# Altium PCB Medusa-AI-coral-dev.PcbDoc (part 1 of 2)
Units mil, origin at the board's own origin, x right, y up, seen from the top; angles counter-clockwise.
Board outline 7750 x 7750 mil, 4 copper layers (Top Layer, Layer 1, Layer 2, Bottom Layer), stack 23.756 mil thick; 116 components, 91 nets, 573 pads, 231 vias.
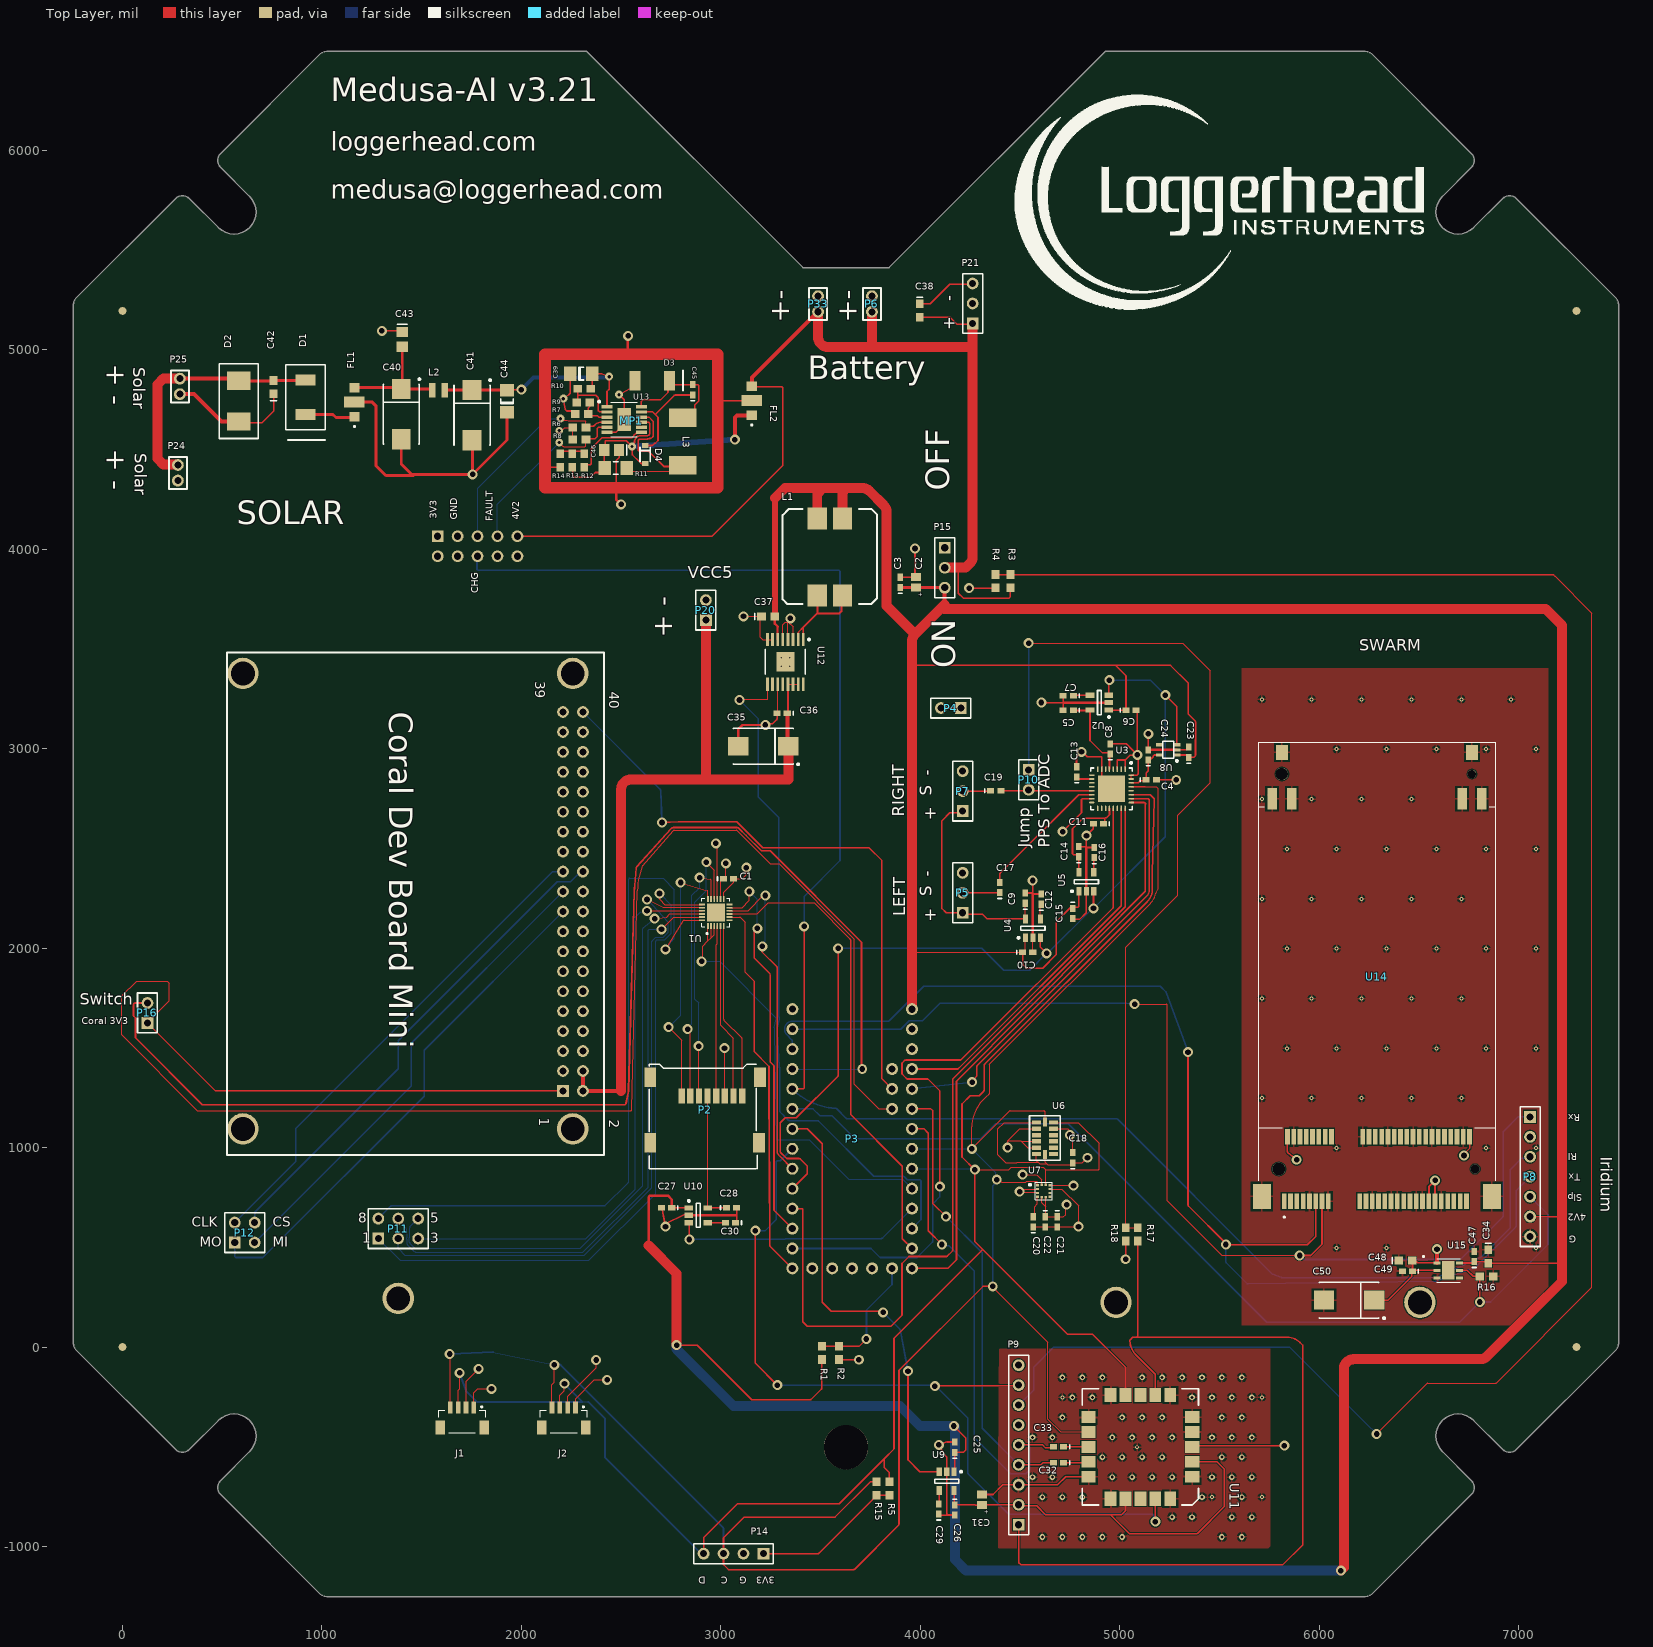
[diagram p0: Top Layer view]
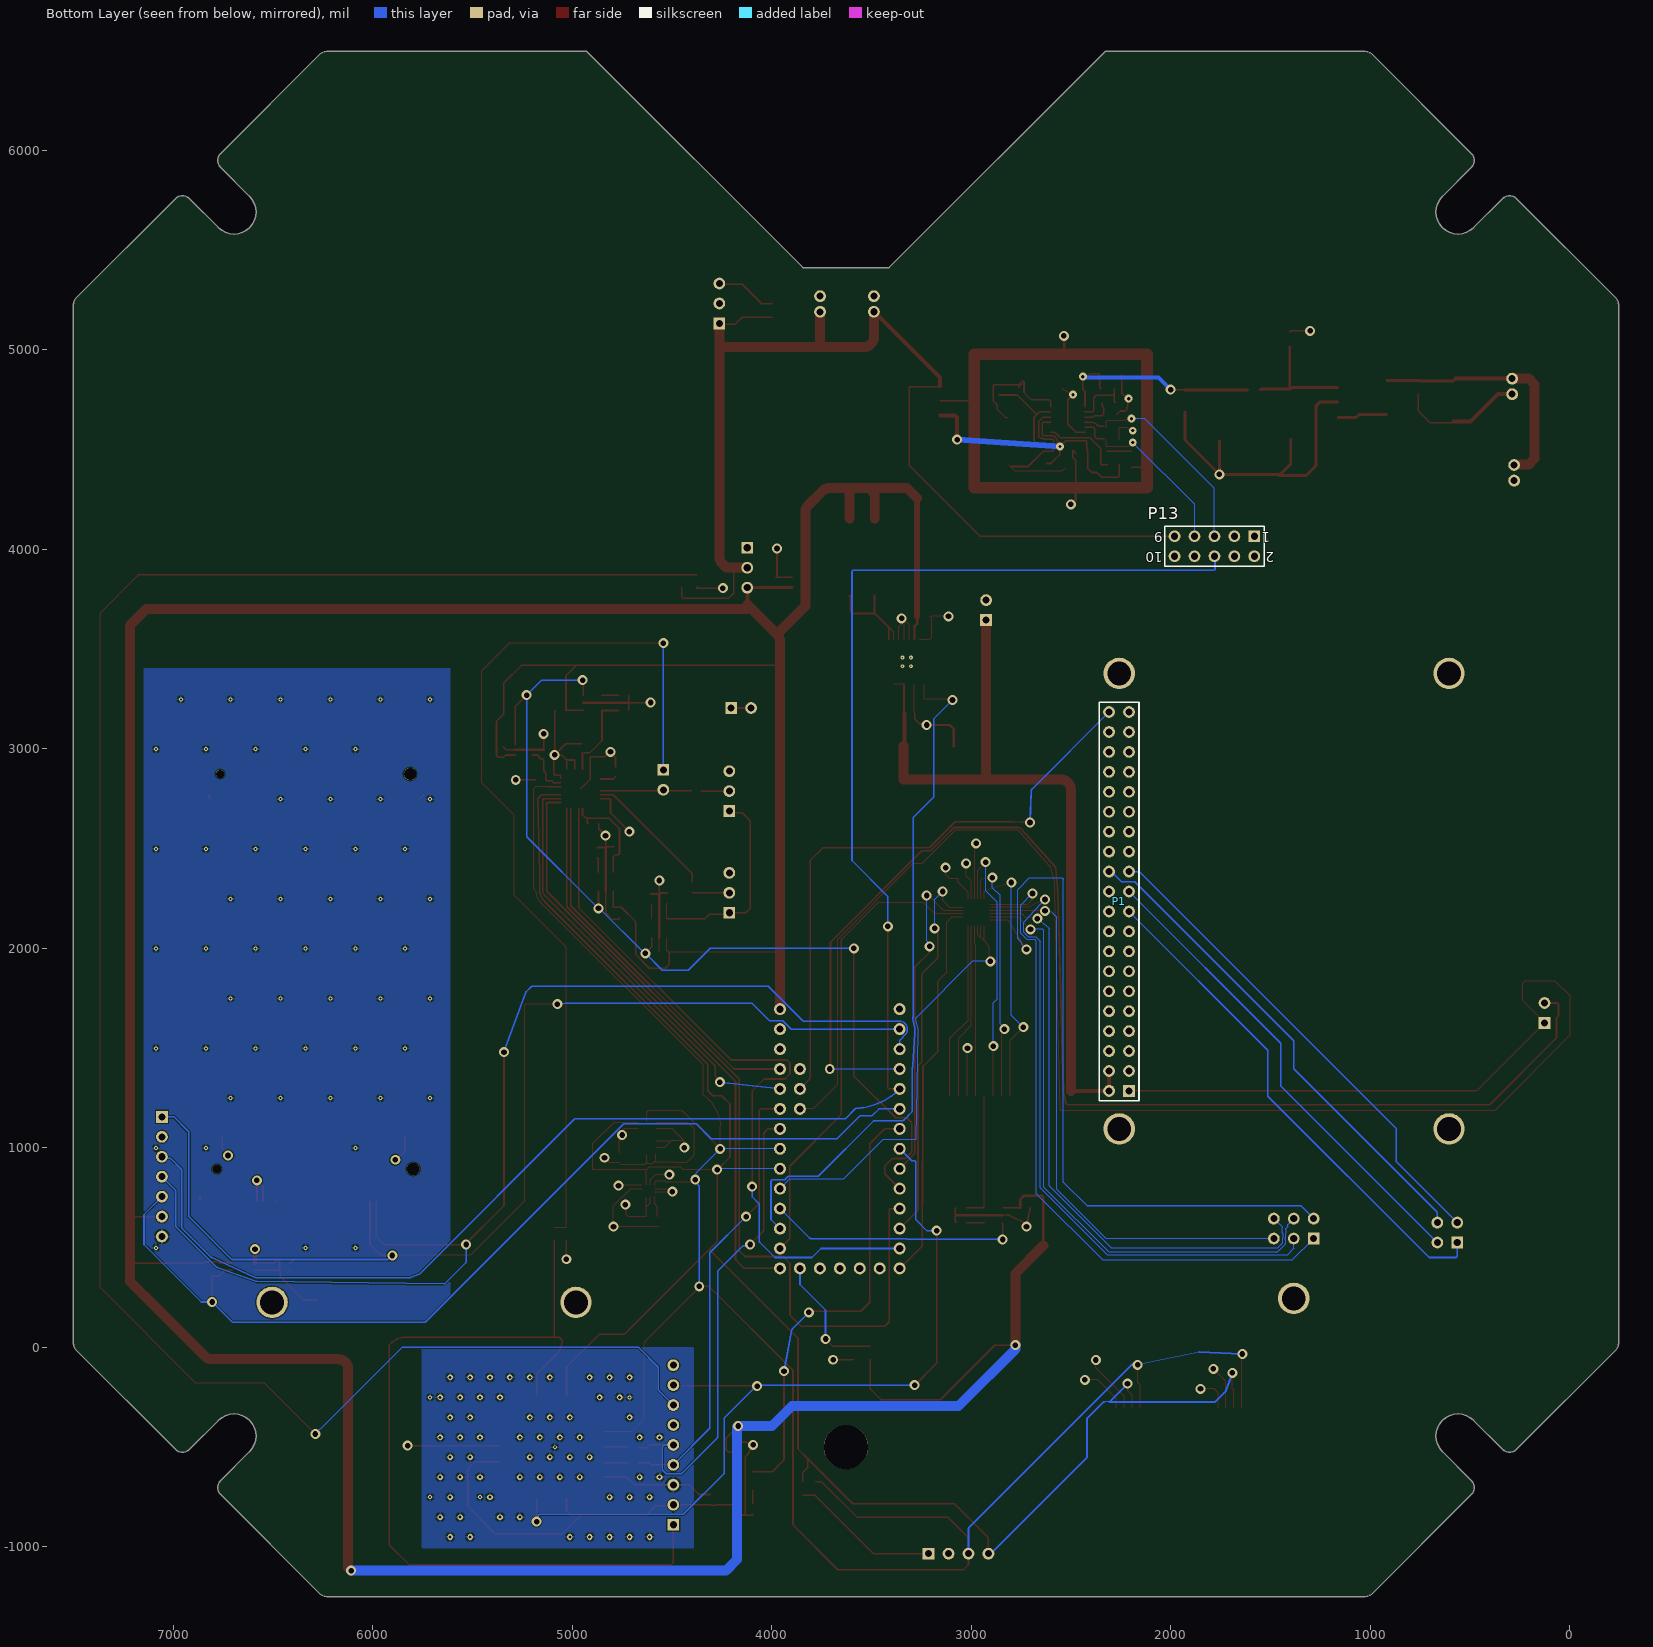
[diagram p1: Bottom Layer view, seen from below]
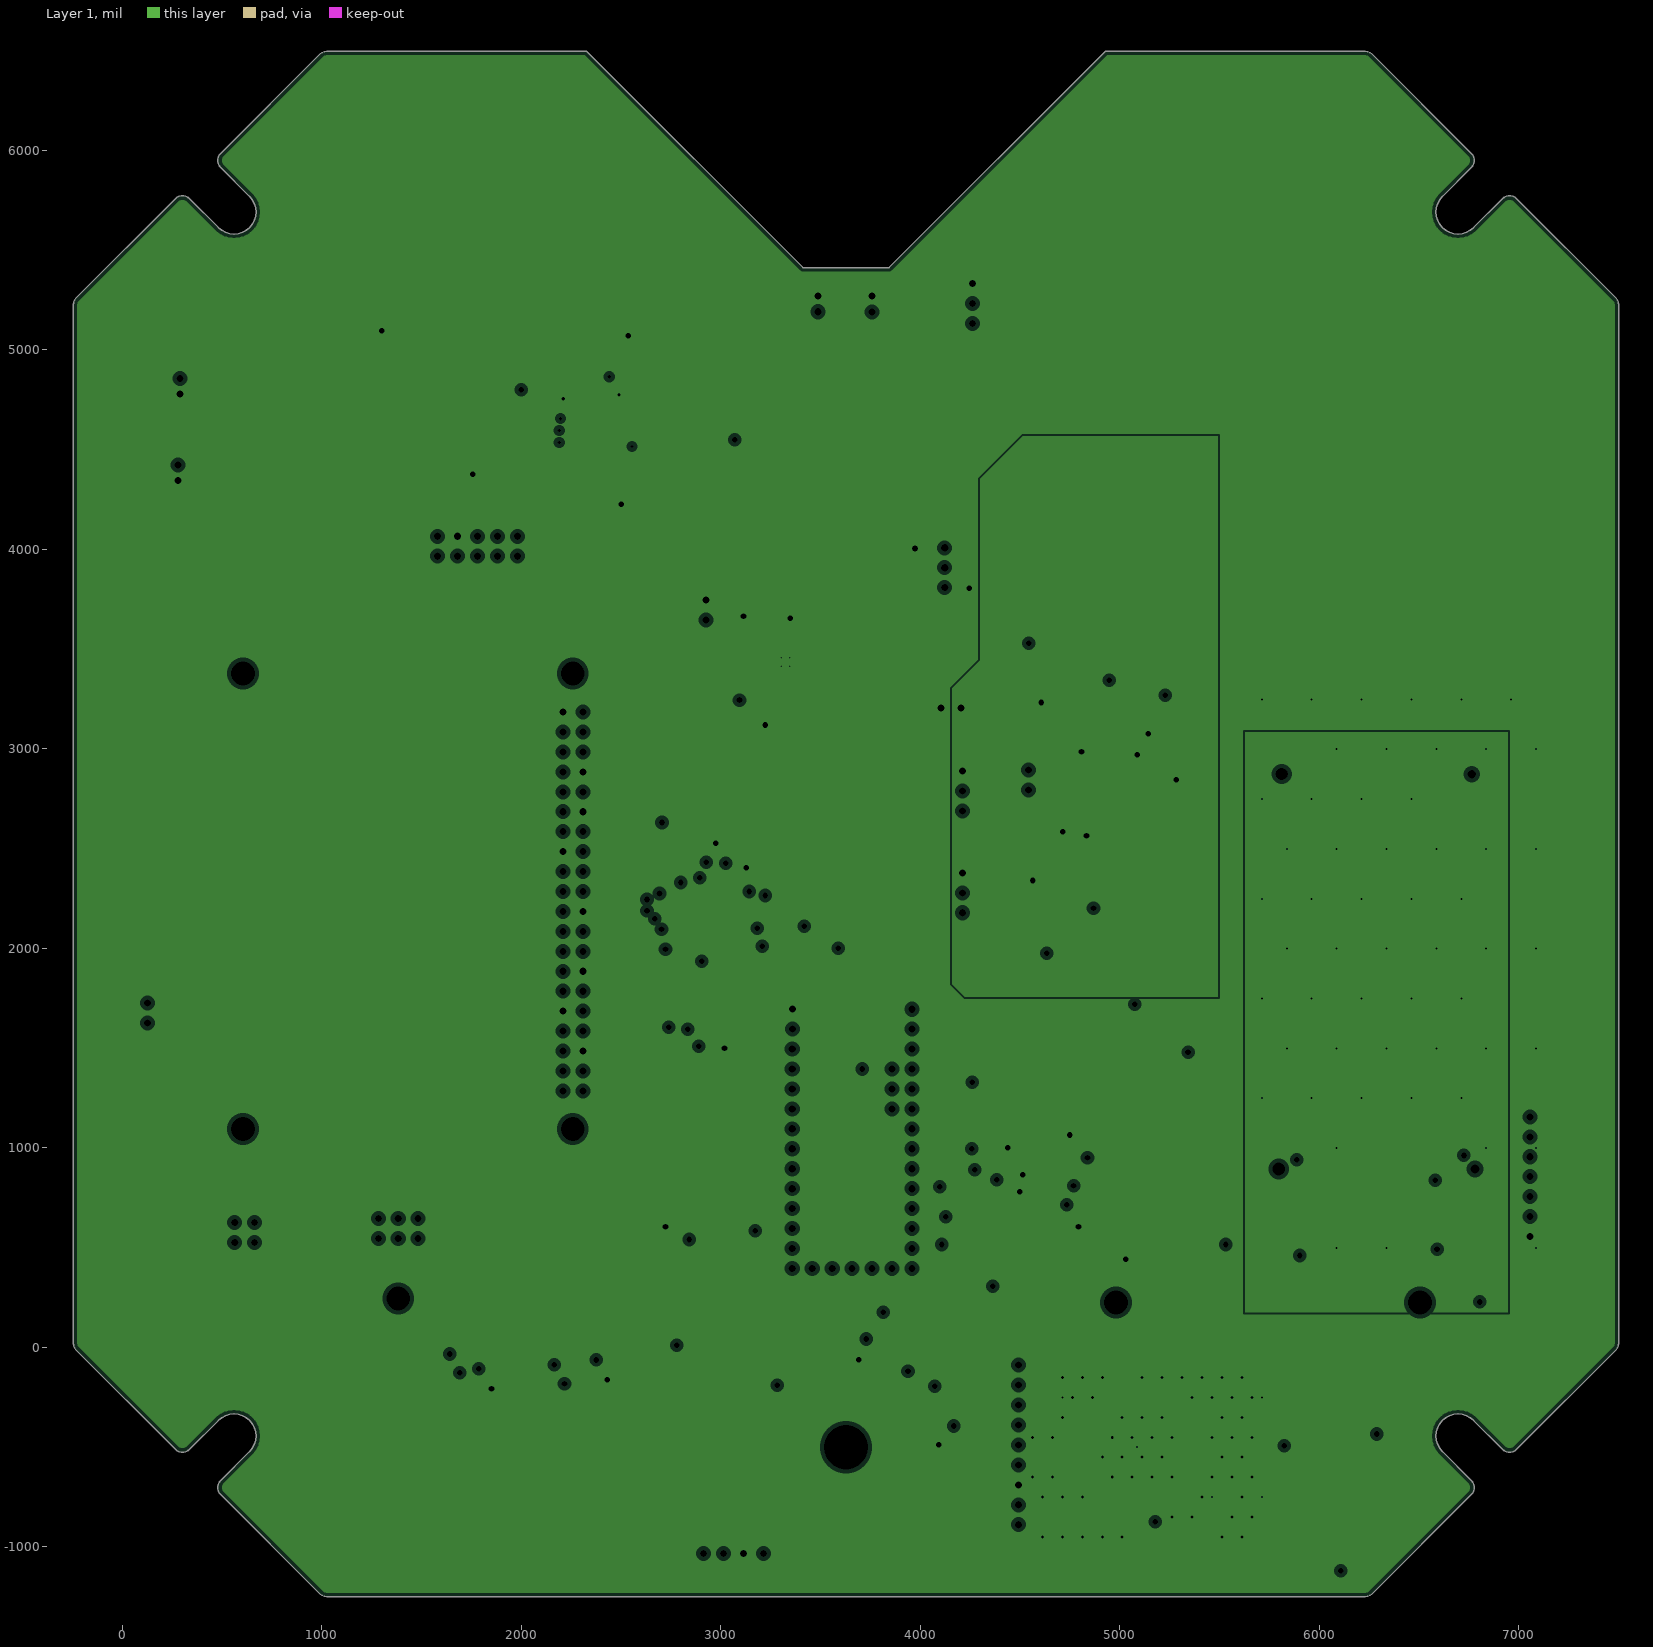
[diagram p2: Layer 1, clearances drawn from the general rule]
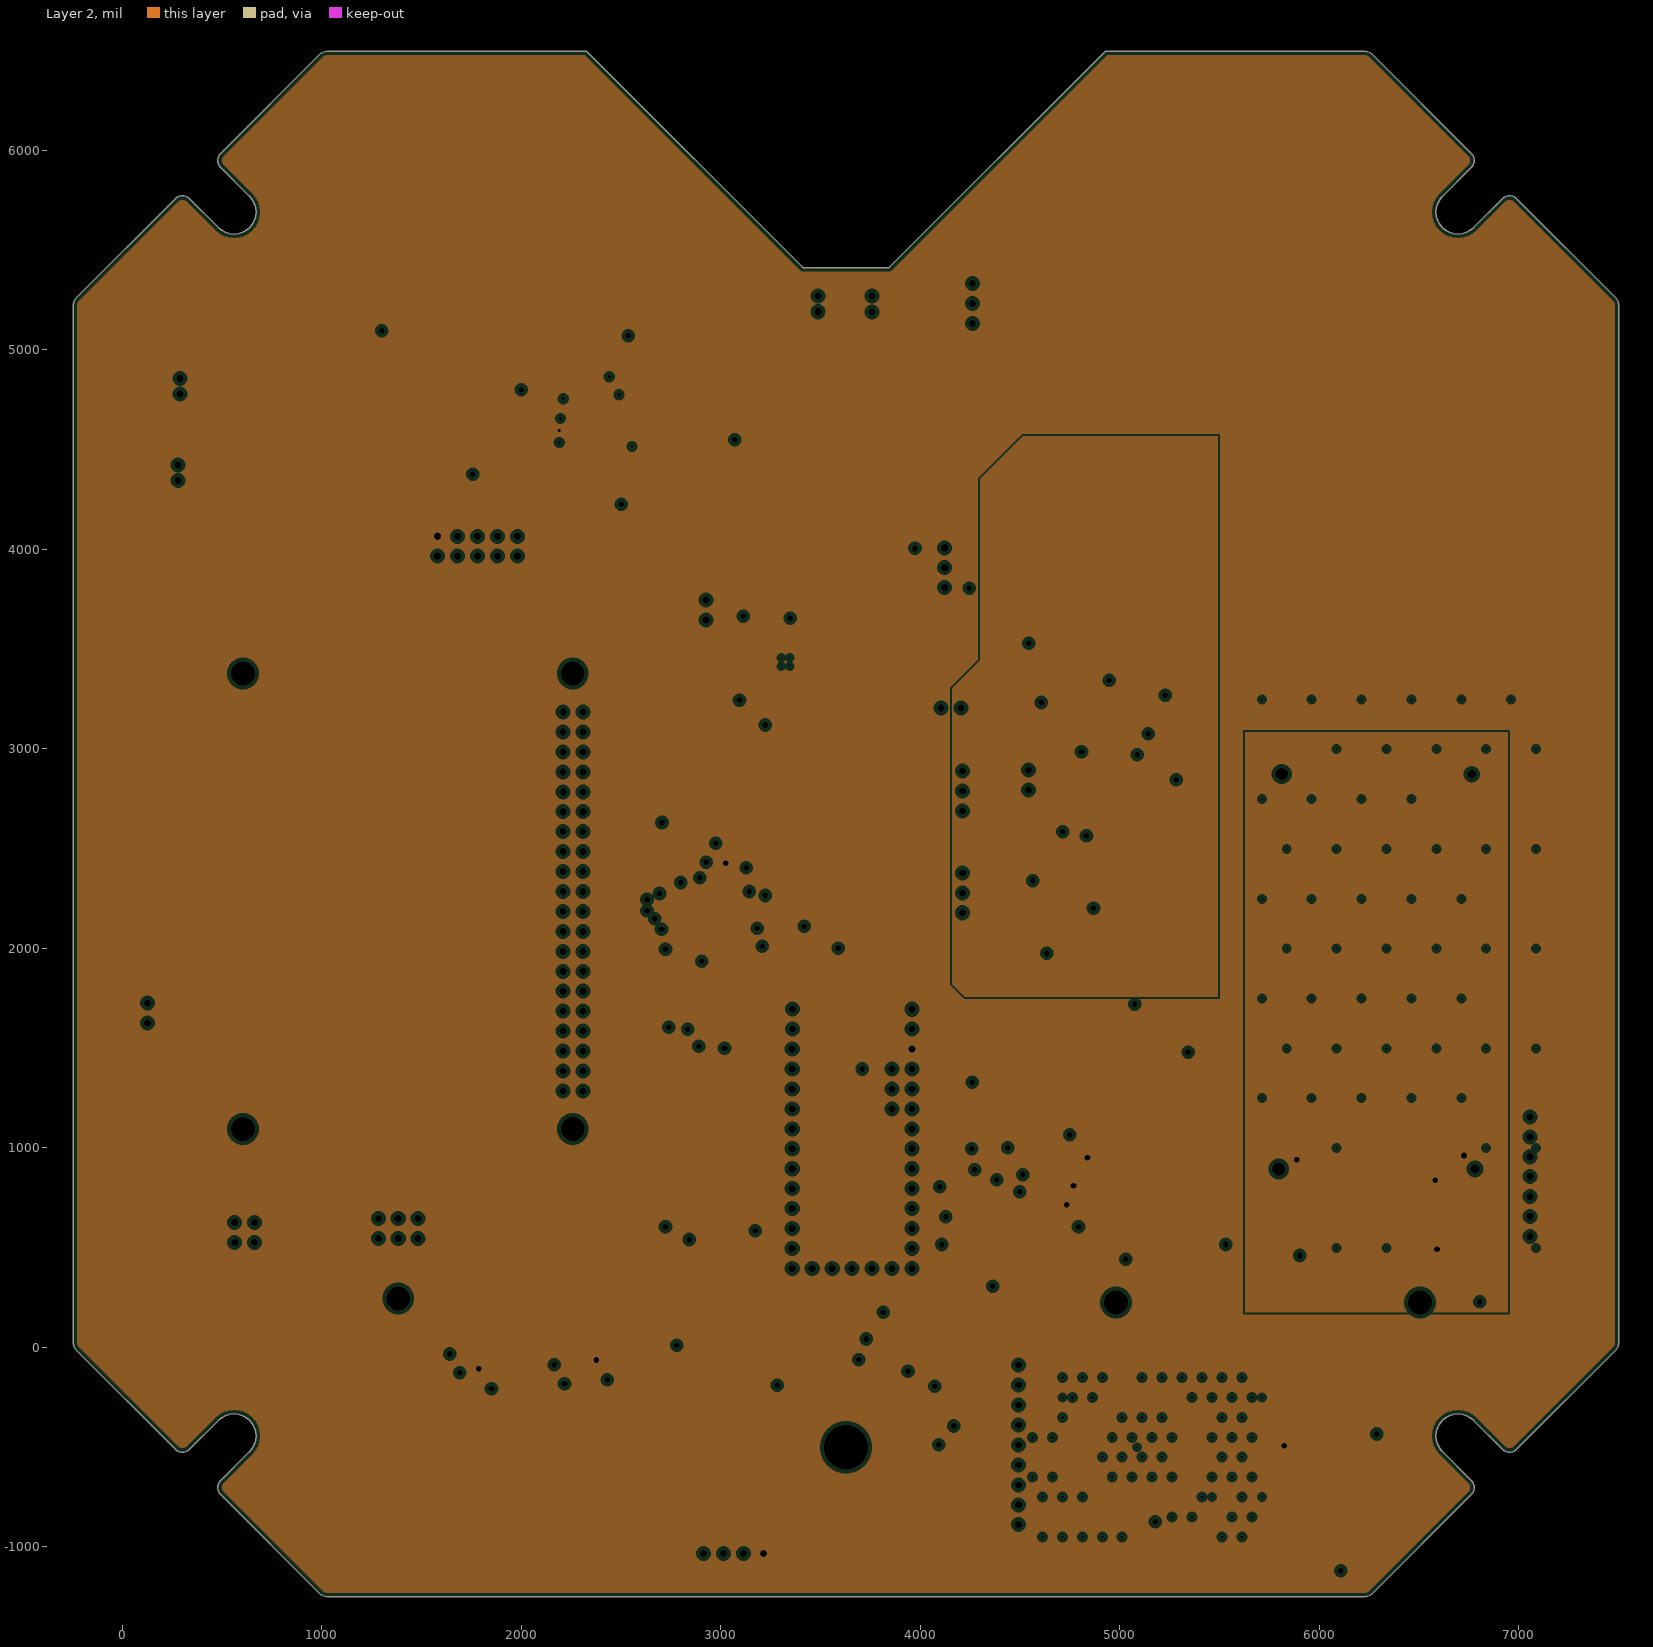
[diagram p3: Layer 2, clearances drawn from the general rule]

## Layer stack, top to bottom
Top Solder: solder mask 0.4, Solder Resist, Dk 3.5
Top Layer: signal copper 1.4
Dielectric 2: prepreg 2.8, PP-006, Dk 4.1
Layer 1: plane copper 1.378, net (Multiple Nets)
Dielectric 1: dielectric 12.6, FR-4, Dk 4.8
Layer 2: plane copper 1.378, net (Multiple Nets)
Dielectric 3: prepreg 2.8, PP-006, Dk 4.1
Bottom Layer: signal copper 1.4
Bottom Solder: solder mask 0.4, Solder Resist, Dk 3.5

## Board outline
477.66,-699.11 480.16,-688.2 485.01,-678.11 491.99,-669.36 637.15,-524.2 650.89,-507.46 661.1,-488.36 667.39,-467.63 669.51,-446.07 667.39,-424.51 661.1,-403.78 650.89,-384.68 637.15,-367.93 620.4,-354.19 601.3,-343.98 580.57,-337.69 559.01,-335.57 537.45,-337.69 516.72,-343.98 497.62,-354.19 480.87,-367.93 335.72,-513.08 326.97,-520.07 316.88,-524.92 305.97,-527.41 294.77,-527.41 283.85,-524.92 273.77,-520.07 265.01,-513.08 -232.91,-15.16 -240.86,-4.8 -245.86,7.26 -247.56,20.2 -247.56,5224.53 -245.86,5237.47 -240.86,5249.53 -232.91,5259.88 265.01,5757.81 273.77,5764.79 283.85,5769.65 294.77,5772.14 305.97,5772.14 316.88,5769.65 326.97,5764.79 335.72,5757.81 480.87,5612.66 497.62,5598.92 516.72,5588.7 537.45,5582.42 559.01,5580.29 580.57,5582.42 601.3,5588.7 620.4,5598.92 637.14,5612.66 650.89,5629.4 661.1,5648.51 667.39,5669.24 669.51,5690.79 667.39,5712.35 661.1,5733.08 650.89,5752.18 637.14,5768.93 491.99,5914.08 485.01,5922.83 480.16,5932.92 477.66,5943.84 477.66,5955.03 480.16,5965.95 485.01,5976.04 491.99,5984.79 989.92,6482.72 1000.28,6490.66 1012.34,6495.66 1025.28,6497.36 2326.36,6497.36 3411.36,5412.36 3843.52,5412.36 4928.52,6497.36 6229.61,6497.36 6242.55,6495.66 6254.61,6490.66 6264.96,6482.72 6762.89,5984.79 6769.87,5976.04 6774.73,5965.95 6777.22,5955.03 6777.22,5943.84 6774.73,5932.92 6769.87,5922.83 6762.89,5914.08 6617.74,5768.93 6603.99,5752.18 6593.78,5733.08 6587.5,5712.35 6585.37,5690.79 6587.5,5669.24 6593.78,5648.51 6603.99,5629.4 6617.74,5612.66 6634.48,5598.92 6653.59,5588.71 6674.31,5582.42 6695.87,5580.29 6717.43,5582.42 6738.16,5588.71 6757.26,5598.92 6774.01,5612.66 6919.16,5757.81 6927.91,5764.79 6938,5769.65 6948.92,5772.14 6960.11,5772.14 6971.03,5769.65 6981.12,5764.79 6989.87,5757.81 7487.8,5259.88 7495.74,5249.53 7500.74,5237.47 7502.44,5224.53 7502.44,20.2 7500.74,7.26 7495.74,-4.8 7487.8,-15.16 6989.87,-513.08 6981.12,-520.07 6971.03,-524.92 6960.11,-527.41 6948.92,-527.41 6938,-524.92 6927.91,-520.07 6919.16,-513.08 6774.01,-367.93 6757.26,-354.19 6738.16,-343.98 6717.43,-337.69 6695.87,-335.57 6674.32,-337.69 6653.59,-343.98 6634.48,-354.19 6617.74,-367.93 6604,-384.68 6593.78,-403.78 6587.5,-424.51 6585.37,-446.07 6587.5,-467.63 6593.78,-488.36 6604,-507.46 6617.74,-524.2 6762.89,-669.35 6769.87,-678.11 6774.73,-688.2 6777.22,-699.11 6777.22,-710.31 6774.73,-721.22 6769.87,-731.31 6762.89,-740.07 6264.96,-1237.99 6254.61,-1245.94 6242.55,-1250.93 6229.61,-1252.64 1025.28,-1252.64 1012.34,-1250.93 1000.28,-1245.94 989.92,-1237.99 491.99,-740.07 485.01,-731.31 480.16,-721.22 477.66,-710.31

## Design rules (kind name [scope] priority, off if disabled: settings)
Clearance [All] p1: gap=5 ignorepadtopadclearanceinfootprint=FALSE except(0: Arc-Hole Track-Hole SMDPad-Hole THPad-Hole Via-Hole Fill-Hole Poly-Hole Region-Hole Text-Hole; 8: Arc-Arc Arc-Track Track-Track)
HoleSize [All] p1: absolutevalues=TRUE maxlimit=300 minlimit=1 maxpercent=80.000 minpercent=20.000
MinimumSolderMaskSliver [All] p1: minsoldermaskwidth=2
PlaneClearance [All] p1: clearance=20
PlaneConnect [All] p1: planeconnectstyle=Relief reliefexpansion=20 reliefentries=4 reliefconductorwidth=10 reliefairgap=10
PolygonConnect [All] p1: connectstyle=Relief reliefconductorwidth=10 reliefentries=4 polygonreliefangle="90 Angle" airgapwidth=10
RoutingVias [All] p1: holewidth=28 width=50 viastyle="Through Hole" minholewidth=28 minwidth=50 maxholewidth=28 maxwidth=50
SilkToSilkClearance [All] p1: silktosilkclearance=1
SolderMaskExpansion [All] p1: expansion=4 istentingtop=FALSE
Width [All] p1: maxlimit=100 minlimit=6 preferedwidth=8
25 further rules are at their usual default settings.

## Classes and differential pairs
component class medusa-ai-sensors: C18 C20 C21 C22 C31 C32 C33 P9 R3 R4 R5 R15 U6 U7 U11
component class medusa-charger: C38 C39 C40 C41 C42 C43 C44 C45 C46 D1 D2 D3 D4 FL1 FL2 L2 L3 MP1 P6 P13 P21 P24 P25 P33 R6 R7 R8 R9 R10 R11 R12 R13 R14 U13
component class medusa-ai-power: C25 C26 C27 C28 C29 C30 C34 C35 C36 C37 C47 C48 C49 C50 L1 P20 R16 U9 U10 U12 U15
component class Medusa-AI-coral-dev: C1 C2 C3 J1 J2 P1 P2 P3 P8 P11 P12 P14 P15 P16 R1 R2 U1 U14
component class medusa-ai-audio: C4 C5 C6 C7 C8 C9 C10 C11 C12 C13 C14 C15 C16 C17 C19 C23 C24 P4 P5 P7 P10 R17 R18 U2 U3 U4 U5 U8

## Components (designator, comment, footprint, x,y, rotation, side; value= is the part's Value field where it differs from the comment)
C1 "0.1uF" 0402 3038.31,2348.9 r0 top
C2 "10uF" Tant0805 3978.31,3833.9 r270 top
C3 "0.1uF" 0402 3898.31,3833.9 r90 top
C4 "0.1uF" 0402 5158.31,2843.9 r0 top
C5 "0.1uF" 0402 4741.77,3191.63 r180 top
C6 "1uF" 0402 5056.77,3191.63 r0 top value=0.1uF
C7 "0.01uF" 0402 4741.77,3266.63 r180 top value=0.1uF
C8 "0.1uF" 0402 4953.31,2998.9 r90 top
C9 "0.1uF" 0402 4525.2,2250.59 r90 top
C10 "1uF" 0402 4538.31,1978.9 r0 top value=0.1uF
C11 "0.1uF" 0402 4893.31,2623.9 r180 top
C12 "0.01uF" 0402 4605.2,2245.59 r90 top value=0.1uF
C13 "0.1uF" 0402 4783.31,2883.9 r90 top
C14 "0.1uF" 0402 4793.31,2483.9 r90 top
C15 "1uF" 0402 4763.31,2173.9 r270 top value=0.1uF
C16 "0.01uF" 0402 4873.31,2478.9 r90 top value=0.1uF
C17 "1.0uF" 0402 4398.31,2303.9 r90 top value=0.1uF
C18 "0.1uF" 0402 4763.31,948.9 r90 top
C19 "1.0uF" 0402 4378.31,2788.9 r0 top value=0.1uF
C20 "100nF" 0402 4567.44,627.36 r90 top value=1.0uF
C21 "1.0uF" 0402 4687.44,627.36 r270 top
C22 "100nF" 0402 4627.44,627.36 r270 top value=1.0uF
C23 "1.0uF" 0402 5345.75,2981.78 r90 top value=0.1uF
C24 "1.0uF" 0402 5143.31,2968.9 r90 top value=0.1uF
C25 "1.0uF" 0402 4172.44,-502.48 r90 top value=0.1uF
C26 "1.0uF" 0402 4172.44,-817.48 r270 top value=0.1uF
C27 "1.0uF" 0402 2728.31,698.9 r180 top value=0.1uF
C28 "1.0uF" 0402 3053.31,698.9 r0 top value=0.1uF
C29 "10nF" 0402 4092.44,-812.48 r90 top value=0.1uF
C30 "10nF" 0402 3048.31,623.9 r180 top value=0.1uF
C31 "1uF" Tant0805 4308.31,-766.1 r270 top
C32 "0402 Ferrite" 0402 4693.31,-581.1 r180 top value=100pF
C33 "0402 Ferrite" 0402 4693.31,-501.1 r180 top value=100pF
C34 "C0603" 0603 6847.44,453.9 r270 top value=10uF
C35 "T495X227K010ATE050" X 3212.44,3012.36 r180 top value=220uF
C36 "2.2uF" 0402 3307.44,3177.36 r180 top
C37 "C0603" 0603 3237.44,3662.36 r0 top value=10uF
C38 "C0603" 0603 3997.44,5197.36 r270 top
C39 "C1206" 1206 2300,4880 r0 top
C40 "T495X" X 1397.44,4677.36 r270 top value=47uF
C41 "T495X" X 1752.44,4672.36 r270 top value=47uF
C42 "C0603" 0603 757.44,4812.36 r90 top
C43 "C0805" 0805 1402.44,5052.36 r270 top value=4.7uF
C44 "C1206" 1206 1927.44,4742.36 r90 top
C45 "C0402" 0402 2860,4800 r90 top value=1uF
C46 "C0805" 0805 2452.44,4497.36 r180 top
C47 "1.0uF" 0402 6777.44,453.9 r90 top value=0.1uF
C48 "C0603" 0603 6432.44,433.9 r0 top value=10uF
C49 "0.1uF" 0402 6442.44,378.9 r180 top
C50 "T495X227K010ATE050" X 6150,235 r180 top value=220uF
D1 "PMEG3050EP*" Diode_PMEG3050EP 917.44,4762.36 r270 top
D2 "26.7V Breakdown" SMBJ24CA 582.44,4742.36 r270 top
D3 "PMEG3050EP*" Diode_PMEG3050EP 2655,4845 r0 top
D4 "BAT46WJ" SOD-323 2620,4475.28 r270 top
FL1 "YFF31HC2A105MT000N" FIL_YFF31HC2A105MT000N 1162.44,4737.36 r90 top
FL2 "YFF31HC2A105MT000N" FIL_YFF31HC2A105MT000N 3155,4745 r90 top
J1 "BM04B-SRSS-TB(LF)(SN)" CONN_BM04B-SRSS-TB(LF)(SN) 1702.44,-356.1 r180 top
J2 "BM04B-SRSS-TB(LF)(SN)" CONN_BM04B-SRSS-TB(LF)(SN) 2212.2,-356.1 r180 top
L1 "6.8uH" "Inductor - duplicate" 3483.31,3768.9 r180 top
L2 "Inductor2016" Inductor2016 1552.44,4797.36 r0 top value=0.47uH
L3 "10uH" Inductor0630CDMCD 2810,4540 r270 top
MP1 "MS223-10F" MS223-10F 2550,4645 r180 top
P1 "Header 20X2" HDR2X20 2208.31,1283.9 r90 bottom
P2 "microSD-Molex" microSD_Molex_hinged 3176.42,1353.39 r270 top
P3 "Teensy3.x" Teensy3.x 3358.31,1493.9 r180 top
P4 "GND Tie" HDR1X2 4203.31,3203.9 r180 top
P5 "HYDROPHONE L" HDR1X3 4212.44,2177.36 r90 top
P6 "BAT" HDR_2x1_2mm 3757.44,5190 r0 top
P7 "HYDROPHONE R" HDR1X3 4212.44,2687.36 r90 top
P8 "Iridium" HDR1X7 7057.44,1153.9 r270 top
P9 "GPS" HDR1X9 4493.31,-891.1 r90 top
P10 "Jumper PPS to Audio R" HDR1X2 4543.31,2893.9 r270 top
P11 "Header 3X2" HDR2X3 1282.44,543.9 r0 top
P12 "Header 2X2" HDR2X2 562.44,523.9 r0 top
P13 "Header 5X2" HDR2X5 1580,4065 r0 bottom
P14 "Header 4" HDR1X4 3213.31,-1036.1 r180 top
P15 "switch" HDR1X3 4122.44,4007.36 r270 top
P16 "Header 2" HDR1X2 125,1625 r90 top
P20 "UltraCap" HDR1X2 2925,3645 r90 top
P21 "3000uF" HDR1X3 4262.44,5132.36 r90 top
P24 "SOLAR" HDR_2x1_2mm 277.44,4422.99 r180 top
P25 "SOLAR" HDR_2x1_2mm 287.44,4856.1 r180 top
P33 "BAT" HDR_2x1_2mm 3487.44,5190.16 r0 top
R1 "100k" 3-0603 3506.69,-28.9 r270 top
R2 "100k" 3-0603 3591.69,-28.9 r90 top
R3 "100k" 3-0603 4451.69,3839.57 r270 top
R4 "100k" 3-0603 4376.69,3839.57 r90 top
R5 "4.7k" 3-0603 3845,-710 r270 top
R6 "330K" 3-0603 2290,4610 r0 top
R7 "51K" 3-0603 2302.44,4677.36 r0 top
R8 "330K" 3-0603 2290,4550 r0 top
R9 "51K" 3-0603 2310,4735 r0 top
R10 "301K" 3-0603 2315,4805 r180 top
R11 "50mOhms" 8-1206 2472.44,4407.36 r180 top
R12 "205K" 3-0603 2315,4445 r270 top
R13 "64K9" 3-0603 2255,4445 r90 top
R14 "330K" 3-0603 2195,4445 r90 top
R15 "4.7k" 3-0603 3780,-710 r270 top
R16 "20k" 3-0603 6838.97,354.31 r0 top
R17 "10k" 3-0603 5090,565 r270 top
R18 "10k" 3-0603 5030,565 r90 top
U1 "MAX4996ETG+" QFN40P350X350X80-25N 2974.57,2179.25 r90 top
U2 "LP3985IM5-3.3" MF05A_N 4898.31,3230.76 r180 top
U3 "SGTL5000" QFN32 4958.31,2798.9 r270 top
U4 "LP3985IM5-3.3" MF05A_N 4564.33,2099.06 r90 top
U5 "LP3985IM5-3.3" MF05A_N 4832.44,2332.36 r90 top
U6 "ADXL343" ADXL345 4582.44,1125.35 r0 top
U7 "LIS3MDL" LGA-12 4587.44,811.73 r0 top
U8 "TLV70018DCKR" TI-DCK5_V 5243.31,2993.9 r180 top
U9 "LP3985IM5-3.3" MF05A_N 4132.44,-672.48 r270 top
U10 "LP3985IM5-3.3" MF05A_N 2886.42,660.43 r0 top
U11 "SAM-M8Q" "GPS SAM-MQ8" 5363.31,-650.51 r180 top
U12 "TPS61032" TPS6103x 3323.46,3435.16 r270 top
U13 "LT3652IMSEPBF" MSOP-12_MSE 2515,4650 r0 top
U14 "M138_MODEM" XCVR_M138_MODEM 5797.48,892.6 r0 top
U15 "LD39200PU33R" SON95P300X300X100-7N 6647.44,383.9 r0 top

## Footprints (in the part's own frame and the unit in brackets; to place one, negate y for a bottom-side part, rotate by r counter-clockwise, add the part's x,y. Pads: shape width x height; smd on the part's side, far side on the other; paste and mask are expansions set on the pad)
3-0603 [mm] "Chip Resistor; Body 1.6 x 0.9 mm (LxW typ)"
  rect 1.1x1 smd: 1(-0.85,0) 2(0.85,0)
8-1206 [mm] "Chip Resistor; Body 3.1 x 1.6 mm (LxW typ)"
  rect 1.6x1.8 smd: 1(-1.4,0) 2(1.4,0)
  silkscreen extent -0.3,-0.8 0.3,0.8
0402 [mm] "Chip Capacitor; Body 1.0 x 0.5 mm (LxW typ)"
  rect 0.9x0.7 smd: 1(-0.65,0) 2(0.65,0)
  silkscreen extent -1.4,-0.25 -1.4,0.25
0603 [mm] "Chip Capacitor; Body 1.6 x 0.8 mm (LxW typ)"
  rect 1.1x1 smd: 1(-0.85,0) 2(0.85,0)
  silkscreen extent -1.7,-0.4 -1.7,0.4
0805 [mm] "Chip Capacitor; Body 2.0 x 1.2 mm (LxW typ)"
  rect 1.3x1.5 smd: 1(-0.95,0) 2(0.95,0)
  silkscreen extent -1.9,-0.65 -1.9,0.65
1206 [mm] "Chip Capacitor; Body 3.2 x 1.6 mm (LxW typ)"
  rect 1.6x1.8 smd: 1(-1.4,0) 2(1.4,0)
  silkscreen extent -0.3,-0.8 0.3,0.8
ADXL345 [mm] "Digital Accelerometer"
  rect 1.145x0.55 smd paste-0.051 mask+0.076: 1(0,0) 2(0,-0.8) 3(0,-1.6) 4(0,-2.4) 5(0,-3.2) 6(0,-4) 8(2.195,-4) 9(2.195,-3.2) 10(2.195,-2.4) 11(2.195,-1.6) 12(2.195,-0.8) 13(2.195,0)
  rect 0.55x1.145 smd paste-0.051 mask+0.076: 7(1.098,-4.098) 14(1.098,0.098)
  silkscreen extent -0.89,-4.83 3.05,0.89
CONN_BM04B-SRSS-TB(LF)(SN) [mm]
  rect 0.6x1.55 smd: 1(-1.5,-1.325) 2(-0.5,-1.325) 3(0.5,-1.325) 4(1.5,-1.325)
  rect 1.2x1.8 smd: S1(-2.8,1.2) S2(2.8,1.2)
  silkscreen extent -3,-1.52 3,1.9
Diode_PMEG3050EP [mm]
  rect 1.4x2.5 smd: A(-2.2,0) K(2.2,0)
  silkscreen extent -4.15,-2.5 5.45,2.5
FIL_YFF31HC2A105MT000N [mm]
  rect 1.2x1.3 smd mask+0: 1(-1.85,0) 3(1.85,0)
  rect 1.4x2.6 smd paste-2 mask+0: 2_4(0,0)
  silkscreen extent -3.2,-0.1 -3,0.1, body extent -1.6,-0.8 1.6,0.8, height 1.5
"GPS SAM-MQ8" [mm]
  rect 1.8x1.5 smd paste-0.25 mask+0.076: 1(0,0) 2(0,-1.9) 3(0,-3.8) 4(0,-5.7) 5(0,-7.6) 11(13.2,-7.6) 12(13.2,-5.7) 13(13.2,-3.8) 14(13.2,-1.9) 15(13.2,0)
  rect 1.5x1.8 smd paste-0.25 mask+0.076: 6(2.8,-10.4) 7(4.7,-10.4) 8(6.6,-10.4) 9(8.5,-10.4) 10(10.4,-10.4) 16(10.4,2.8) 17(8.5,2.8) 18(6.6,2.8) 19(4.7,2.8) 20(2.8,2.8)
  silkscreen extent -0.8,-11.2 14,3.6
HDR1X2 [mm] "Connector; Header; 2 Position"
  rect 1.5x1.5 hole 0.9: 1(0,0)
  round 1.5 hole 0.9: 2(2.54,0)
  silkscreen extent -1.27,-1.27 3.81,1.27
HDR1X3 [mm] "Connector; Header; 3 Position"
  rect 1.5x1.5 hole 0.9: 1(0,0)
  round 1.5 hole 0.9: 2(2.54,0) 3(5.08,0)
  silkscreen extent -1.27,-1.27 6.35,1.27
HDR1X4 [mm] "Connector; Header; 4 Position"
  rect 1.5x1.5 hole 0.9: 1(0,0)
  round 1.5 hole 0.9: 2(2.54,0) 3(5.08,0) 4(7.62,0)
  silkscreen extent -1.27,-1.27 8.89,1.27
HDR1X7 [mm] "Connector; Header; 7 Position"
  rect 1.5x1.5 hole 0.9: 1(0,0)
  round 1.5 hole 0.9: 2(2.54,0) 3(5.08,0) 4(7.62,0) 5(10.16,0) 6(12.7,0) 7(15.24,0)
  silkscreen extent -1.27,-1.27 16.51,1.27
HDR1X9 [mm] "Connector; Header; 9 Position"
  rect 1.5x1.5 hole 0.9: 1(0,0)
  round 1.5 hole 0.9: 2(2.54,0) 3(5.08,0) 4(7.62,0) 5(10.16,0) 6(12.7,0) 7(15.24,0) 8(17.78,0) 9(20.32,0)
  silkscreen extent -1.27,-1.27 21.59,1.27
HDR2X2 [mm] "Connector; Header; 2x2 Position"
  rect 1.5x1.5 hole 0.9: 1(0,0)
  round 1.5 hole 0.9: 2(0,2.54) 3(2.54,0) 4(2.54,2.54)
  silkscreen extent -1.27,-1.27 3.81,3.81
HDR2X3 [mm] "Connector; Header; 3x2 Position"
  rect 1.5x1.5 hole 0.9: 1(0,0)
  round 1.5 hole 0.9: 2(0,2.54) 3(2.54,0) 4(2.54,2.54) 5(5.08,0) 6(5.08,2.54)
  silkscreen extent -1.27,-1.27 6.35,3.81
HDR2X5 [mm] "Connector; Header; 5x2 Position"
  rect 1.5x1.5 hole 0.9: 1(0,0)
  round 1.5 hole 0.9: 2(0,2.54) 3(2.54,0) 4(2.54,2.54) 5(5.08,0) 6(5.08,2.54) 7(7.62,0) 8(7.62,2.54) 9(10.16,0) 10(10.16,2.54)
  silkscreen extent -1.27,-1.27 11.43,3.81
HDR2X20 [mm] "Connector; Header; 20x2 Position"
  rect 1.5x1.5 hole 0.9: 1(0,0)
  round 1.5 hole 0.9: 2(0,2.54) 3(2.54,0) 4(2.54,2.54) 5(5.08,0) 6(5.08,2.54) 7(7.62,0) 8(7.62,2.54) 9(10.16,0) 10(10.16,2.54) 11(12.7,0) 12(12.7,2.54) 13(15.24,0) 14(15.24,2.54) 15(17.78,0) 16(17.78,2.54) 17(20.32,0) 18(20.32,2.54) 19(22.86,0) 20(22.86,2.54) 21(25.4,0) 22(25.4,2.54) 23(27.94,0) 24(27.94,2.54) 25(30.48,0) 26(30.48,2.54) 27(33.02,0) 28(33.02,2.54) 29(35.56,0) 30(35.56,2.54) 31(38.1,0) 32(38.1,2.54) 33(40.64,0) 34(40.64,2.54) 35(43.18,0) 36(43.18,2.54) 37(45.72,0) 38(45.72,2.54) 39(48.26,0) 40(48.26,2.54)
  silkscreen extent -1.27,-1.27 49.53,3.81
HDR_2x1_2mm [mm]
  round 1.5 hole 0.9: 1(0,0.016) 2(0,2)
  silkscreen extent -1.14,-1.02 1.14,3.05
Inductor0630CDMCD [mm]
  rect 2.35x3.5 smd: 1(-3.025,0) 2(3.025,0)
Inductor2016 [mm]
  rect 0.8x1.8 smd: 1(0,0) 2(1.6,0)
"Inductor - duplicate" [mm] "Sumida Inductor"
  rect 2.45x2.8 smd: 1(-3.2,0) 1(0,0) 2(-3.2,-9.8) 2(0,-9.8)
  silkscreen extent -7.6,-11 4.4,1.1
LGA-12 [mm] "LIS2DS12"
  rect 0.35x0.3 smd paste-0.025 mask+0.051: 1(0,0) 2(0,-0.5) 3(0,-1) 4(0,-1.5) 7(1.6,-1.5) 8(1.6,-1) 9(1.6,-0.5) 10(1.6,0)
  rect 0.3x0.35 smd paste-0.025 mask+0.051: 5(0.55,-1.55) 6(1.05,-1.55) 11(1.05,0.05) 12(0.55,0.05)
  silkscreen extent -1.05,-1.85 1.9,0.35
MF05A_N [mm] "SOT23, 5-Leads, Body 2.9x1.6mm, Pitch 0.95mm, Lead Span 2.8mm, IPC Medium Density"
  rect 1.1x0.65 smd: 1(-1.2,0.95) 2(-1.2,0) 3(-1.2,-0.95) 4(1.2,-0.95) 5(1.2,0.95)
  silkscreen extent -1.33,-1.55 0.25,1.95, body extent -0.9,-1.55 0.9,1.55, height 1.19
microSD_Molex_hinged [mm]
  rect 2.5x1.5 smd: 0(0,0.508) 0(8.382,0.381)
  rect 2.5x1.45 smd: 0(0,-13.45) 0(8.382,-13.462)
  rect 1.9x0.8 smd: 1(2.4,-9.475) 2(2.4,-8.375) 3(2.4,-7.275) 4(2.4,-6.175) 5(2.4,-5.075) 6(2.4,-3.975) 7(2.4,-2.875) 8(2.4,-1.775)
  silkscreen extent -1.65,-13.59 11.68,0.13
MS223-10F [mil]
  Top Layer lines w59.06: 432.09,336.61 432.09,335.41 432.09,230.41 432.09,-331.91 432.09,-332.68 425.39,-332.68 0,-332.68 -0.76,-332.68 -375,-332.68 -430.15,-332.68 -430.91,-332.68 -434.06,-332.68 -434.06,-331.91 -434.06,-109.59 -434.06,335.41 -434.06,336.61 -426.18,336.61 -371.18,336.61 -56.18,336.61 0,336.61 29.68,336.61 427.35,336.61 432.09,336.61
MSOP-12_MSE [mil]
  rect 55x17 smd paste-3 mask+2: 1(-86,64) 2(-86,38.4) 3(-86,12.8) 4(-86,-12.8) 5(-86,-38.4) 6(-86,-64) 7(86,-64) 8(86,-38.4) 9(86,-12.8) 10(86,12.8) 11(86,38.4) 12(86,64)
  rect 69x116 smd paste-200: 13(0,0)
  silkscreen extent -66,-86 66,86
QFN32 [mm]
  oval 0.7x0.2 smd: 1(-2.5,1.75) 2(-2.5,1.25) 3(-2.5,0.75) 4(-2.5,0.25) 5(-2.5,-0.25) 6(-2.5,-0.75) 7(-2.5,-1.25) 8(-2.5,-1.75) 17(2.5,-1.75) 18(2.5,-1.25) 19(2.5,-0.75) 20(2.5,-0.25) 21(2.5,0.25) 22(2.5,0.75) 23(2.5,1.25) 24(2.5,1.75)
  oval 0.2x0.7 smd: 9(-1.75,-2.5) 10(-1.25,-2.5) 11(-0.75,-2.5) 12(-0.25,-2.5) 13(0.25,-2.5) 14(0.75,-2.5) 15(1.25,-2.5) 16(1.75,-2.5) 25(1.75,2.5) 26(1.25,2.5) 27(0.75,2.5) 28(0.25,2.5) 29(-0.25,2.5) 30(-0.75,2.5) 31(-1.25,2.5) 32(-1.75,2.5)
  rect 3.4x3.4 smd paste-1.2: 33(0,0)
  silkscreen extent -3.42,-2.65 2.65,2.65, body extent -2.5,-2.5 2.5,2.5, height 1
QFN40P350X350X80-25N [mm]
  rrect6% 0.76x0.22 smd paste-0.051 mask+0.076: 1(-1.73,1) 2(-1.73,0.6) 3(-1.73,0.2) 4(-1.73,-0.2) 5(-1.73,-0.6) 6(-1.73,-1) 13(1.73,-1) 14(1.73,-0.6) 15(1.73,-0.2) 16(1.73,0.2) 17(1.73,0.6) 18(1.73,1)
  rrect6% 0.22x0.76 smd paste-0.051 mask+0.076: 7(-1,-1.73) 8(-0.6,-1.73) 9(-0.2,-1.73) 10(0.2,-1.73) 11(0.6,-1.73) 12(1,-1.73) 19(1,1.73) 20(0.6,1.73) 21(0.2,1.73) 22(-0.2,1.73) 23(-0.6,1.73) 24(-1,1.73)
  rect 2.3x2.3 smd paste-2.54: 25(0,0)
  silkscreen extent -2.8,-1.8 1.8,1.8
SMBJ24CA [mm]
  rect 2.3x3 smd: 1(-2.6,0) 2(2.6,0)
  silkscreen extent -4.75,-2.5 4.75,2.5
SOD-323 [mm]
  rect 0.63x0.83 smd: A(1.15,0) C(-1.15,0)
  silkscreen extent -0.9,-0.65 0.9,0.65
SON95P300X300X100-7N [mm]
  rrect25% 0.86x0.4 smd: 1(-1.435,0.95) 2(-1.435,0) 3(-1.435,-0.95) 4(1.435,-0.95) 5(1.435,0) 6(1.435,0.95)
  rect 1.63x2.37 smd paste-2: 7(0,0)
  silkscreen extent -3.27,-1.5 1.5,1.88
Tant0805 [mil]
  rect 40x50 smd: 1(-26.5,0) 2(26.5,0)
Teensy3.x [mil]
  round 60 hole 35: 0(0,-100) GND(0,-200)
  round 60 hole 36: 1(0,0) 2(0,100) 3(0,200) 3.3V2(-200,1100) 4(0,300) 5(0,400) 6(0,500) 7(0,600) 8(0,700) 9(0,800) 10(0,900) 11(0,1000) 12(0,1100) 13(-600,1100) 14(-600,1000) 15(-600,900) 16(-600,800) 17(-600,700) 18(-600,600) 19(-600,500) 20(-600,400) 21(-600,300) 22(-600,200) 23(-600,100) A10(-500,200) A11(-500,300) A14(-500,1100) AGND(-600,-100) AREF(-500,100) GND2(-300,1100) PGM(-400,1100) VBat(-100,1100) Vin(-600,-200)
  round 60 hole 36 paste+0: 3.3V(-600,0)
TI-DCK5_V [mm] "SOT23, 5-Leads, Body 2x1.25mm, Pitch 0.65mm"
  rect 0.9x0.4 smd: 1(-1.1,0.65) 2(-1.1,0) 3(-1.1,-0.65) 4(1.1,-0.65) 5(1.1,0.65)
  silkscreen extent -1.23,-1.07 0.7,1.52, body extent -0.63,-1 0.63,1, height 1.1
TPS6103x [mm] "TSOP, 16-Leads, Body 5.00x4.40mm, Pitch 0.65mm, Thermal Pad 2.31.2x2.46.2mm, IPC Medium Density"
  rect 1.7x0.35 smd paste-0.051 mask+0.102: 1(-2.85,2.275) 2(-2.85,1.625) 3(-2.85,0.975) 4(-2.85,0.325) 5(-2.85,-0.325) 6(-2.85,-0.975) 7(-2.85,-1.625) 8(-2.85,-2.275) 9(2.85,-2.275) 10(2.85,-1.625) 11(2.85,-0.975) 12(2.85,-0.325) 13(2.85,0.325) 14(2.85,0.975) 15(2.85,1.625) 16(2.85,2.275)
  rect 2.46x2.31 smd paste-0.102: 17(0,0)
  silkscreen extent -2.97,-2.55 1.6,3.13, body extent -2.25,-2.55 2.25,2.55, height 1.2
X [mm] "Capacitor, SM Tantalum; Body 7.3 x 4.3 mm (LxW typ)"
  rect 2.6x2.4 smd: 1(-3.2,0) 2(3.2,0)
  silkscreen extent -4.58,-2.3 3.8,2.42
XCVR_M138_MODEM [mm]
  rect 0.6x2 smd: 1(0.7,-4.1) 2(1.1,4.1) 3(1.5,-4.1) 4(1.9,4.1) 5(2.3,-4.1) 6(2.7,4.1) 7(3.1,-4.1) 8(3.5,4.1) 9(3.9,-4.1) 10(4.3,4.1) 11(4.7,-4.1) 12(5.1,4.1) 13(5.5,-4.1) 14(5.9,4.1) 15(6.3,-4.1) 16(6.7,4.1) 17(10.3,-4.1) 18(10.7,4.1) 19(11.1,-4.1) 20(11.5,4.1) 21(11.9,-4.1) 22(12.3,4.1) 23(12.7,-4.1) 24(13.1,4.1) 25(13.5,-4.1) 26(13.9,4.1) 27(14.3,-4.1) 28(14.7,4.1) 29(15.1,-4.1) 30(15.5,4.1) 31(15.9,-4.1) 32(16.3,4.1) 33(16.7,-4.1) 34(17.1,4.1) 35(17.5,-4.1) 36(17.9,4.1) 37(18.3,-4.1) 38(18.7,4.1) 39(19.1,-4.1) 40(19.5,4.1) 41(19.9,-4.1) 42(20.3,4.1) 43(20.7,-4.1) 44(21.1,4.1) 45(21.5,-4.1) 46(21.9,4.1) 47(22.3,-4.1) 48(22.7,4.1) 49(23.1,-4.1) 50(23.5,4.1) 51(23.9,-4.1) 52(24.3,4.1)
  rect 2.3x3.2 smd: 53(-2.15,-3.5) 54(27.15,-3.5)
  rect 1.5x1.9 smd: S1_1(0.4,53.05) S2_1(24.6,53.05)
  rect 1.2x2.7 smd: S1_2(-0.85,47.15) S1_3(1.65,47.15) S2_2(23.35,47.15) S2_3(25.85,47.15)
  round 1.63 hole 1.63 unplated: ""(0,0)
  round 1.58 hole 1.58 unplated: ""(0.4,50.3)
  round 1.08 hole 1.08 unplated: ""(24.6,50.3)
  round 1.13 hole 1.13 unplated: ""(25,0)
  silkscreen extent -2.54,-6.23 27.61,54.37

## Part data
C1 C3 C4 C5 C6 C7 C8 C9 C10 C11 C12 C13 C14 C15 C16 C17 C18 C19 C20 C21 C22 C23 C24 C25 C26 C27 C28 C29 C30 C32 C33 C36 C47 C49: library part C0402, "Ceramic Chip Capacitor - Standard", PackageDocument=Mar-2001, Code_IPC="1005 [0402]", Code_JEITA=0402, ComponentLink1Description="Manufacturer Link", ComponentLink1URL=http://www.kemet.com/, ComponentLink2Description=Datasheet, ComponentLink2URL=http://www.kemet.com/kemet/web/homepage/kechome.nsf/vapubfilesname/F3102TA.pdf/$file/F3102TA.pdf, DatasheetDocument=Mar-2001, LatestRevisionDate=19-Mar-2004, LatestRevisionNote="Silkscreen size reduced.", Note="Footprint corresponds to dimensions for bulk cassette packaging. This case size has tightened tolerances.", PackageReference=0402, Published=17-Jul-2002, Publisher="Altium Limited"
C2 C31: library part Tant0805
C34 C37 C38 C39 C43 C44 C45 C46 C48: "Ceramic Chip Capacitor - Standard", PackageDocument=Mar-2001, ComponentLink1Description="Manufacturer Link", ComponentLink1URL=http://www.kemet.com/, ComponentLink2Description=Datasheet, ComponentLink2URL=http://www.kemet.com/kemet/web/homepage/kechome.nsf/vapubfilesname/F3102TA.pdf/$file/F3102TA.pdf, DatasheetDocument=Mar-2001, LatestRevisionDate=19-Mar-2004, LatestRevisionNote="Silkscreen size reduced.", Published=17-Jul-2002, Publisher="Altium Limited"
  C34 C37 C48: Code_IPC="1608 [0603]", Code_JEITA=0603, Note="Footprint corresponds to dimensions for bulk cassette packaging. This case size has tightened tolerances.", PackageReference=0603
  C38: 50V=1nF, Code_IPC="1608 [0603]", Code_JEITA=0603, Note="Footprint corresponds to dimensions for bulk cassette packaging. This case size has tightened tolerances.", PackageReference=0603
  C39 C44: 50V=10uF, Code_IPC="3216 [1206]", Code_JEITA=1206, PackageReference=1206
  C43: Code_IPC=2012[0805], Code_JEITA=0805, Note="Footprint corresponds to dimensions for bulk cassette packaging. This case size has tightened tolerances.", PackageReference=0805
  C45: Code_IPC="1005 [0402]", Code_JEITA=0402, Note="Footprint corresponds to dimensions for bulk cassette packaging. This case size has tightened tolerances.", PackageReference=0402
  C46: 6.3V=10uF, Code_IPC=2012[0805], Code_JEITA=0805, Note="Footprint corresponds to dimensions for bulk cassette packaging. This case size has tightened tolerances.", PackageReference=0805
C35 C50: library part T495X, "Solid Tantalum Chip Capacitor, Standard T495 Series - Low ESR, Surge Robust", PackageDocument=Mar-2001, Code_JEITA=7343-43, ComponentLink1Description="Manufacturer Link", ComponentLink1URL=http://www.kemet.com/, ComponentLink2Description=Datasheet, ComponentLink2URL=http://www.kemet.com/kemet/web/homepage/kechome.nsf/vapubfilesname/F3102TA.pdf/$file/F3102TA.pdf, DatasheetDocument=Mar-2001, LatestRevisionDate=19-Mar-2004, LatestRevisionNote="Silkscreen dimensions re-sized.", PackageReference=X, PCB_Layout="Round Glue Pad at 2.9 ±0.1mm in diameter at KEMET's option", Published=17-Jul-2002, Publisher="Altium Limited"
C40 C41: "Solid Tantalum Chip Capacitor, Standard T495 Series - 35V 10%", PackageDocument=Mar-2001, Code_JEITA=7343-43, ComponentLink1Description="Manufacturer Link", ComponentLink1URL=http://www.kemet.com/, ComponentLink2Description=Datasheet, ComponentLink2URL=http://www.kemet.com/kemet/web/homepage/kechome.nsf/vapubfilesname/F3102TA.pdf/$file/F3102TA.pdf, DatasheetDocument=Mar-2001, LatestRevisionDate=19-Mar-2004, LatestRevisionNote="Silkscreen dimensions re-sized.", PackageReference=X, PCB_Layout="Round Glue Pad at 2.9 ±0.1mm in diameter at KEMET's option", Published=17-Jul-2002, Publisher="Altium Limited"
C42: "100V 20%", PackageDocument=Mar-2001, 100V, 20%=100nF, Code_IPC="1608 [0603]", Code_JEITA=0603, ComponentLink1Description="Manufacturer Link", ComponentLink1URL=http://www.kemet.com/, ComponentLink2Description=Datasheet, ComponentLink2URL=http://www.kemet.com/kemet/web/homepage/kechome.nsf/vapubfilesname/F3102TA.pdf/$file/F3102TA.pdf, DatasheetDocument=Mar-2001, LatestRevisionDate=19-Mar-2004, LatestRevisionNote="Silkscreen size reduced.", Note="Footprint corresponds to dimensions for bulk cassette packaging. This case size has tightened tolerances.", PackageReference=0603, Published=17-Jul-2002, Publisher="Altium Limited"
D1 D3: library part Diode_PMEG3050EP
D2: library part SMBJ24CA
D4: "Diode Schottky 100V 250mA (DC) Surface Mount SOD-323F", Package="SOD-323 NXP Semiconductors", Availability=Bad, MF="NXP Semiconductors", MP=BAT46WJ, Price=None, SnapEDA_Link=https://www.snapeda.com/parts/BAT46WJ/NXP%20Semiconductors/view-part/4222338/?ref=snap
FL1 FL2: "1ÂµF Feed Through Capacitor 100V 6A 5mOhm 1206 (3216 Metric), 4 PC Pad", Package="1206 TDK", Availability=Good, Check_prices=https://www.snapeda.com/parts/YFF31HC2A105MT000N/TDK-Lambda%20Americas%20Inc/view-part/566443/?ref=eda, MF=TDK, MP=YFF31HC2A105MT000N, Price=None, Purchase-URL=https://pricing.snapeda.com/search/part/YFF31HC2A105MT000N/?ref=eda, SnapEDA_Link=https://www.snapeda.com/parts/YFF31HC2A105MT000N/TDK-Lambda%20Americas%20Inc/view-part/566443/?ref=snap
J1 J2: "Connector Header Surface Mount 4 position 0.039 _1.00mm_", Package=None, Availability=Unavailable, MF="JST Sales", MP=BM04B-SRSS-TB_LF__SN_, Price=None, SnapEDA_Link=https://www.snapeda.com/parts/BM04B-SRSS-TB%28LF%29%28SN%29/JST%20Sales%20America%20Inc./view-part/91778/?ref=snap
L1: library part "Inductor 6.8uH", "Sumida Inductor", Supplier Part Number 1=308-1937-2-ND, Supplier 1=Digi-Key
L2: Supplier Part Number 1=1276-6902-1-ND, Supplier 1=Digi-Key
L3: library part Inductor_0630CDMCD
MP1: "RF Shield"
P1: "Header, 20-Pin, Dual row", LatestRevisionDate=17-Jul-2002, LatestRevisionNote="Re-released for DXP Platform.", Publisher="Altium Limited"
P2: library part microSD_Molex_hinged, Supplier Part Number 1=WM19081DKR-ND, Supplier 1=Digi-Key
P4 P10 P20: library part "Header 2", "Header, 2-Pin", LatestRevisionDate=17-Jul-2002, LatestRevisionNote="Re-released for DXP Platform.", Publisher="Altium Limited"
P5 P7 P15 P21: library part "Header 3", "Header, 3-Pin", LatestRevisionDate=17-Jul-2002, LatestRevisionNote="Re-released for DXP Platform.", Publisher="Altium Limited"
P6 P24 P25 P33: library part HDR_2x1_2mm
P8: library part "Header 7", "Header, 7-Pin", LatestRevisionDate=17-Jul-2002, LatestRevisionNote="Re-released for DXP Platform.", Publisher="Altium Limited"
P9: library part "Header 9", "Header, 9-Pin", LatestRevisionDate=17-Jul-2002, LatestRevisionNote="Re-released for DXP Platform.", Publisher="Altium Limited"
P11: "Header, 3-Pin, Dual row", LatestRevisionDate=17-Jul-2002, LatestRevisionNote="Re-released for DXP Platform.", Publisher="Altium Limited"
P12: "Header, 2-Pin, Dual row", LatestRevisionDate=17-Jul-2002, LatestRevisionNote="Re-released for DXP Platform.", Publisher="Altium Limited"
P13: "Header, 5-Pin, Dual row", LatestRevisionDate=17-Jul-2002, LatestRevisionNote="Re-released for DXP Platform.", Publisher="Altium Limited"
P14: "Header, 4-Pin", LatestRevisionDate=17-Jul-2002, LatestRevisionNote="Re-released for DXP Platform.", Publisher="Altium Limited"
P16: "Header, 2-Pin", LatestRevisionDate=17-Jul-2002, LatestRevisionNote="Re-released for DXP Platform.", Publisher="Altium Limited"
R1 R2 R3 R4 R5 R15 R16 R17 R18: library part ERJ3RK, "Precision Thick Film Chip Resistor, 10 Ohm to 1M Ohm Range, 1% and 0.5% Tolerance, 0603 Size, 0.063 W", PackageDocument=Mar-2003, Code_IPC="1608 [0603]", ComponentLink1Description="Manufacturer Link", ComponentLink1URL=http://www.panasonic.com/industrial/components/resistive_products.htm, ComponentLink2Description=Datasheet, ComponentLink2URL=http://www.panasonic.com/industrial/components/pdf/AOA0000CE2.pdf, LatestRevisionDate=19-Mar-2004, LatestRevisionNote="Silkscreen size reduced.", PackageReference=3-0603, Published=17-Dec-2003, Publisher="Altium Limited"
R6 R7 R8 R9 R10 R12 R13 R14: library part ERJ3EK, "Precision Thick Film Chip Resistor, 10 Ohm to 1M Ohm Range, 1% and 0.5% Tolerance, 0603 Size, 0.063 W", PackageDocument=Mar-2003, Code_IPC="1608 [0603]", ComponentLink1Description="Manufacturer Link", ComponentLink1URL=http://www.panasonic.com/industrial/components/resistive_products.htm, ComponentLink2Description=Datasheet, ComponentLink2URL=http://www.panasonic.com/industrial/components/pdf/AOA0000CE2.pdf, LatestRevisionDate=19-Mar-2004, LatestRevisionNote="Silkscreen size reduced.", PackageReference=3-0603, Published=17-Dec-2003, Publisher="Altium Limited"
R11: library part ERJ8EN, "Precision Thick Film Chip Resistor, 10 Ohm to 2.2M Ohm Range, 1% Tolerance, 1206 Size, 0.125 W", PackageDocument=Mar-2003, Code_IPC="3216 [1206]", ComponentLink1Description="Manufacturer Link", ComponentLink1URL=http://www.panasonic.com/industrial/components/resistive_products.htm, ComponentLink2Description=Datasheet, ComponentLink2URL=http://www.panasonic.com/industrial/components/pdf/AOA0000CE2.pdf, LatestRevisionDate=19-Mar-2004, LatestRevisionNote="Silkscreen size reduced.", PackageReference=8-1206, Published=17-Dec-2003, Publisher="Altium Limited"
U1: "3 Circuit IC Switch 2:2 4Ohm 24-TQFN (4x4)", Package="TQFN-24 Maxim", Availability=Warning, Check_prices=https://www.snapeda.com/parts/MAX4996ETG+/Maxim%20Integrated/view-part/1193961/?ref=eda, MF="Maxim Integrated", MP=MAX4996ETG+, Price=None, Purchase-URL=https://pricing.snapeda.com/search/part/MAX4996ETG+/?ref=eda, SnapEDA_Link=https://www.snapeda.com/parts/MAX4996ETG+/Maxim%20Integrated/view-part/1193961/?ref=snap
U2 U4 U5 U9 U10: "Micropower, 150mA Low-Noise Ultra Low-Dropout CMOS Voltage Regulator", DigiKeyPartNumber=LP3985IM5-3.3CT-ND, Manufacturer="National Semiconductor", PackageTopMarking=LDQB*XTT, PowerWise=N, ComponentLink1Description="LP3985 Datasheet", ComponentLink1URL=http://www.national.com/ds/LP/LP3985.pdf, ComponentLink2Description="LP3985 Web Page", ComponentLink2URL=http://www.national.com/pf/LP/LP3985.html, ComponentLink3Description="MF05A Package Page", ComponentLink3URL=http://www.national.com/packaging/folders/mf05a.html, CompType="LDO IC", DatasheetVersion=Aug-2005, PackageDescription="Molded SOT-23, .115 x .063 x .040 in Body, 5 Lead, .0375 in Pitch", PackageReference=MF05A, PackageVersion="revD, Aug-2008", PartNumber=LP3985IM5-3.3, PinCount=5, Published=4-Dec-2008, Publisher="Altium Limited", RoHS=O
U6: library part ADXL345
U7: "magnetometer"
U8: "Single Output LDO, 200 mA, Fixed 1.8 V Output, 2 to 5.5 V Input, with Low IQ, 5-pin SC70 (DCK), -40 to 125 degC, Green (RoHS & no Sb/Br)", Manufacturer="Texas Instruments", Supplier Part Number 1=296-32409-2-ND, Accuracy(%)=2, Code_JEDEC=MO-203, ComponentLink1Description="Manufacturer URL", ComponentLink1URL=http://www.ti.com/, ComponentLink2Description=Datasheet, ComponentLink2URL=http://www.ti.com/general/docs/lit/getliterature.tsp?genericPartNumber=TLV70018&fileType=pdf, ComponentLink3Description="Package Specification", ComponentLink3URL=http://www.ti.com/litv/pdf/mpds025f, DatasheetVersion=SLVSA00D, Eco-Plan="Green (RoHS & no Sb/Br)", Fixed Output Options(V)=1.8, Iout(Max)(A)=0.2, Iq(Typ)(mA)=0.03, Mounting Technology="Surface Mount", PackageDescription="5-Pin Plastic Small-Outline, Body 2 x 1.25 mm, Pitch 0.65 mm", PackageReference=DCK5, PackageVersion=4093553-3/G, PartNumber=TLV70018DCKR, SubFamily="Single Channel LDO", Supplier 1=Digi-Key, Supplier 2=Digi-Key, Supplier 3=Digi-Key, Supplier 4=Newark, Supplier 5=Mouser, Supplier Part Number 2=296-32409-1-ND, Supplier Part Number 3=296-32409-6-ND, Supplier Part Number 4=55R7461, Supplier Part Number 5=595-TLV70018DCKR, Vdo(Typ)(mV)=175, Vin(Max)(V)=5.5, Vin(Min)(V)=2, Vout Adj(Max)(V)=1.8, Vout Adj(Min)(V)=1.8
U11: library part "GPS SAM-M8Q"
U12: library part TPS6103x, "Boost converter", Supplier 1=Newark, Supplier 2=Digi-Key, Supplier Part Number 2=296-14418-1-ND
U13: "Battery Charger Li-Ion 2000mA 4.2V Automotive 12-Pin MSOP EP Tube", Package="MSOP W/ EP-12 Analog Devices", Digi-Key_Part_Number=LT3652IMSE#PBF-ND, Digi-Key_Purchase_URL=https://www.digikey.com/product-detail/en/linear-technology-analog-devices/LT3652IMSE-PBF/LT3652IMSE-PBF-ND/2237473?utm_source=snapeda&utm_medium=aggregator&utm_campaign=symbol, MF="Analog Devices", MP=LT3652IMSE#PBF, SnapEDA_Link=https://www.snapeda.com/parts/LT3652IMSE%23PBF/Analog%20Devices/view-part/4331669/?ref=snap
U14: "Swarm M138 Modem", Package=Package, Availability="Not in stock", Check_prices=https://www.snapeda.com/parts/M138%20Modem/Swarm/view-part/?ref=eda, MF=Swarm, MP="M138 Modem", Price=None, SnapEDA_Link=https://www.snapeda.com/parts/M138%20Modem/Swarm/view-part/?ref=snap
U15: "Linear Voltage Regulator IC 1 Output 2A 6-DFN _3x3_", Package="DFN-6 STMicroelectronics", Availability=Unavailable, MF=STMicroelectronics, MP=LD39200PU33R, Price=None, SnapEDA_Link=https://www.snapeda.com/parts/LD39200PU33R/STMicroelectronics/view-part/482679/?ref=snap

## Free pads (board coordinates)
  round 157.48 hole 120: 0(603.9,1093.9) 0(603.9,3377.36) 0(1382.44,243.9) 0(2257.44,1093.9) 0(2257.44,3377.36) 0(4981.46,223.9) 0(6505.08,223.9)
  round 221 hole 221: 1(3627.44,-502.64)
  round 39.37 smd: 10(0,0) 10(0,5195) 10(7290,0) 10(7290,5195)

## Via types
v1: diameter 28, hole 15, Top Layer to Bottom Layer, tented both sides, 61 vias
v2: diameter 50, hole 28, Top Layer to Bottom Layer, tented both sides, 60 vias
v3: diameter 20, hole 10, Top Layer to Bottom Layer, tented both sides, 59 vias
v4: diameter 50, hole 28, Top Layer to Bottom Layer, 40 vias
v5: diameter 40, hole 16, Top Layer to Bottom Layer, tented both sides, 5 vias
v6: diameter 19.68, hole 7.87, Top Layer to Bottom Layer, 4 vias
v7: diameter 38, hole 16, Top Layer to Bottom Layer, tented both sides, 2 vias

## Nets (pads, with @x,y where several pads share a name; then routed paths per layer and width w, separated by ;. In a path a pad name is that pad's centre, name@x,y a point inside that pad or via, vN(x,y) a via of type N, cw(c..) or ccw(c..) an arc to the next point about the centre after c; other vN are vias at no path point)
3V3: C1.1 C18.1 C21.1 C22.1 J1.2 J2.2 P3.3.3V P13.1 P14.1 R5.2 R6.1 R8.1 R15.2 U1.14 U6.1 U6.6 U6.7 U7.5 U7.6 U7.10 U11.3 | length 3401.5
  Top Layer w6: J1.2@1722.13,-303.94 1722.13,-172.87 v4(1785,-110) ; v7(2190,4595.12) 2201.91,4595.12 2216.79,4610 R6.1@2256.54,4610 R8.1@2256.54,4550 ; J2.2@2231.89,-303.94 2231.89,-246.89 2375,-103.78 v4(2375,-65) ; U1.14@2998.19,2247.36 2998.19,2338.12 3008.97,2348.9 C1.1@3012.72,2348.9 3025,2359.68 v2(3025,2425) ; U6.6@4582.44,967.87 4582.44,933.76 4590.37,925.83 ; U6.1@4582.44,1125.35 4419.76,1125.35 4388.31,1093.9 4388.31,963.9 4428.31,923.9 4483.31,923.9 4485.24,925.83 4590.37,925.83 ; U7.5@4609.09,750.71 4609.09,722.18 4628.78,702.5 ; U6.7@4625.65,964.04 4625.65,926.55 4634.31,917.9 ; U7.6@4628.78,750.71 4628.78,702.5 ; U7.10@4650.43,811.73 4651.21,810.95 4766.25,810.95 v2(4768.31,808.9) ; v2(4733.31,713.9) 4728.31,708.9 4728.31,663.9 4717.36,652.95 C21.1@4687.44,652.95 C22.1@4627.44,652.95 4628.78,654.29 4628.78,702.5 ; C18.1@4758.31,913.9 4638.31,913.9 4634.31,917.9 ; C18.1@4763.31,923.31 4812.72,923.31 v2(4838.31,948.9) ; 4590.37,925.83 4598.31,917.9 4634.31,917.9
  Top Layer w8: P14.1@3213.31,-1036.1 3486.02,-1036.1 ccw(c3486.02,-1028.1) 3491.66,-1033.77 3780,-745.43 R15.2@3780,-743.46 R5.2@3845,-743.46 ; U11.3@5363.31,-500.91 5369.21,-495 v2(5825,-495)
4V2: C38.2 FL2.3 P6.1 P13.9 P15.2 P21.1 P33.1 R3.2 | length 5709.2
  Top Layer w8: P13.9@1980,4065 2955,4065 3310,4420 3310,4810.31 3305.31,4815 3157.83,4815 FL2.3@3155,4817.83 ; C38.2@3997.44,5163.9 4144.99,5163.9 cw(c4144.99,5155.9) 4150.65,5161.55 4183.31,5128.9 4258.98,5128.9 P21.1@4262.44,5132.36 ; 4190,3907.56 4190,3780 4215,3755 4445,3755 4451.69,3761.69 R3.2@4451.69,3806.1
  Top Layer w20: FL2.3@3155,4817.83 3155,4851.78 cw(c3175,4851.72) 3160.8,4865.8 3251.63,4956.63 cw(c3265.77,4942.48) 3251.68,4956.68 P33.1@3481.54,5186.54
  Top Layer w50: P33.1@3487.44,5190.79 3487.44,5063.8 ccw(c3537.44,5063.9) 3537.34,5013.9 3757.44,5013.9 ; P6.1@3757.44,5190.63 3757.44,5013.9 ; P15.2@4122.44,3907.36 4122.64,3907.56 4190,3907.56 4226.97,3907.56 4247.8,3928.39 ccw(c4212.44,3963.74) 4262.44,3963.74 4262.44,5003.9 ; P21.1@4262.44,5132.36 4262.44,5003.9 ; 3757.44,5013.9 4252.44,5013.9 4262.44,5003.9
5V_ENABLE: P3.15 U12.9 | length 3472.6
  Top Layer w6: v4(3093.31,3243.9) 3097.54,3248.13 3233.9,3248.13 U12.9@3233.9,3322.95
  Bottom Layer w8: v4(3093.31,3243.9) 3188.31,3148.9 3188.31,2757.09 3290.31,2655.09 3290.31,1657.38 cw(c3277.31,1649.9) 3292.31,1649.9 cw(c3284.31,1649.91) 3292.31,1649.79 3292.27,1647.14 cw(c3271.27,1647.45) 3291.91,1643.6 3283.31,1597.5 ccw(c3369.94,1581.32) 3281.97,1575.93 3292.36,1406.59 cw(c3284.37,1406.1) 3292.37,1406.38 ; 3292.37,1406.36 ccw(c3300.36,1406.55) 3293.49,1402.46 ; 3293.51,1402.43 cw(c3286.65,1398.31) 3294.65,1398.31 3294.65,1184.5 ccw(c3302.65,1184.5) 3296.99,1178.84 3312.22,1163.62 cw(c3306.56,1157.96) 3313.14,1162.52 ccw(c3358.31,1193.9) 3326.95,1148.71 3328.02,1147.81 3338.49,1137.34 ccw(c3344.15,1143) 3344.15,1135 3483.89,1135 cw(c3483.89,1127) 3489.55,1132.66 3763.87,858.33 ccw(c3769.53,863.99) 3769.53,855.99 3911.22,855.99 cw(c3911.22,840.99) 3921.83,851.59 3932.18,841.24 ccw(c3937.83,846.9) 3937.83,838.9 3998.62,838.9 4003.31,834.21 4003.31,638.9 P3.15@3958.31,593.9
AGND: C4.2 C5.2 C6.2 C7.2 C8.2 C9.2 C10.2 C11.2 C12.2 C13.2 C14.2 C15.2 C16.2 C23.2 C24.2 P4.1 P5.3 P7.3 U2.2 U3.1 U3.3 U3.7 U3.15 U3.31 U3.32 U3.33 U4.2 U5.2 U8.2 | length 3245.6
  Top Layer w6: C10.2@4563.9,1978.9 4563.9,2051.38 U4.2@4564.33,2051.81 ; U3.31@5056.73,2848.11 U3.32@5056.73,2867.8
  Top Layer w8: C9.2@4525.2,2276.18 4559.64,2276.18 4564.33,2271.49 ; v2(4563.31,2338.9) 4564.33,2337.87 4564.33,2271.49 ; C12.2@4605.2,2271.18 4564.64,2271.18 4564.33,2271.49 ; v2(4606.77,3231.63) 4607.64,3230.76 4716.46,3230.76 ; v2(4713.31,2583.9) 4808.31,2678.9 4808.31,2745 4812.99,2749.68 U3.15@4859.88,2749.68 ; C7.2@4716.18,3266.63 4716.18,3231.04 4716.46,3230.76 ; C5.2@4716.46,3191.91 4716.46,3230.76 ; C15.2@4763.31,2148.31 4767.72,2143.9 4798.31,2143.9 4832.44,2178.03 U5.2@4832.44,2285.12 ; C13.2@4783.31,2909.49 4783.31,2956.57 4808.31,2981.57 v2(4808.31,2983.9) 4812.21,2983.9 4836.42,2959.68 4909.09,2959.68 U3.7@4909.09,2897.32 4909.09,2848.11 U3.33@4958.31,2798.9 ; C14.2@4793.31,2509.49 4793.9,2508.9 4827.75,2508.9 4832.44,2504.21 ; C11.2@4867.72,2623.9 4867.72,2598.31 v2(4833.31,2563.9) 4832.44,2563.03 4832.44,2504.21 ; C16.2@4873.31,2504.49 4832.72,2504.49 4832.44,2504.21 ; C8.2@4953.31,3024.49 5032.72,3024.49 v2(5088.31,2968.9) ; U3.3@4987.83,2897.32 4987.83,2943.43 5027.83,2943.43 ; U3.1@5027.2,2897.32 5027.2,2942.8 5027.83,2943.43 ; U3.32@5056.73,2867.8 5087.2,2867.8 5093.31,2873.9 5093.31,2963.9 v2(5088.31,2968.9) ; C6.2@5082.36,3191.63 5088.31,3185.68 v2(5088.31,2968.9) ; v2(5143.31,3073.9) C24.2@5143.31,2994.49 C24.2@5143.9,2993.9 ; C4.2@5183.9,2843.9 v2(5283.31,2843.9) ; U8.2@5286.61,2993.9 5331.65,2993.9 5343.31,3005.55 C23.2@5343.31,3009.49 ; 5027.83,2943.43 5051.31,2966.9 5086.31,2966.9 v2(5088.31,2968.9)
  Top Layer w12: U4.2@4564.33,2051.81 4564.33,2271.49 ; 4716.46,3230.76 U2.2@4945.55,3230.76 ; U5.2@4832.44,2285.12 4832.44,2504.21 ; C24.2@5143.9,2993.9 U8.2@5286.61,2993.9
BAT: C46.2 D4.A FL2.1 R11.2 R13.1 U13.9 | length 1591
  Top Layer w8: R13.1@2257.44,4423.9 2257.44,4367.56 2265,4360 2345,4360 2370,4385 2394.96,4385 R11.2@2417.32,4407.36 2415.04,4409.65 C46.2@2415.04,4497.36 2420.31,4502.64 2420.31,4544 2526,4544 2549,4521 2549,4515 v5(2555,4515) ; 2557.36,4472.64 2587.66,4442.34 2597.68,4432.32 ccw(c2603.31,4438) 2603.31,4430 D4.A@2620,4430 ; 2557.34,4472.66 cw(c2563.02,4478.29) 2555.02,4478.26 v5(2555,4515) ; 2567.03,4541.39 2567.03,4536.33 cw(c2559.03,4536.33) 2564.69,4530.67 2555,4520.99 v5(2555,4515) ; 2567.03,4541.43 cw(c2575.03,4541.35) 2567.77,4544.71 2571.22,4552.16 cw(c2593,4542.09) 2572.83,4555.09 2574.38,4557.5 cw(c2594.56,4544.5) 2594.52,4568.5 2628.5,4568.5 ccw(c2628.5,4577.5) 2632.24,4569.31 2632.3,4569.34 2638.12,4572.01 ccw(c2634.8,4579.29) 2642.8,4579.29 2642.8,4629.2 ccw(c2634.8,4629.2) 2640.46,4634.86 2638.11,4637.2 U13.9@2601,4637.2 ; FL2.1@3152.83,4670 FL2.1@3155,4672.17
  Top Layer w20: v4(3070,4550) 3070,4660 3080,4670 FL2.1@3152.83,4670
  Bottom Layer w30: v5(2555,4515) v4(3070,4550)
BCLK: P3.9 U3.24 | length 4263.1
  Top Layer w8: P3.9@3358.31,693.9 3404.99,693.9 cw(c3404.99,685.9) 3410.65,691.55 3410.65,126.55 3433.31,103.9 3853.31,103.9 3905.96,156.55 ccw(c3900.31,162.21) 3908.31,162.21 3908.31,418.9 3943.31,453.9 4129.99,453.9 ccw(c4129.99,461.9) 4135.64,456.23 4160.99,481.58 ccw(c4155.31,487.21) 4163.31,487.21 4163.31,1344.1 5027.2,2208 U3.24@5027.2,2700.47
BOOST: C45.1 D4.C U13.11 | length 500.5
  Top Layer w8: U13.11@2601,4688.4 2658.4,4688.4 2670.9,4675.9 ; D4.C@2635,4520 2653.37,4520 ccw(c2653.37,4528) 2659.02,4522.34 2666.96,4530.28 ccw(c2666.96,4538.28) 2672.61,4532.61 ; 2672.62,4532.62 2685,4545 2685,4661.8 2670.9,4675.9 ; 2771.45,4773.18 ccw(c2771.49,4765.18) 2765.85,4770.85 2670.9,4675.9 ; 2771.49,4773.18 C45.1@2860,4773.18
CHRG: P13.5 R6.2 U13.4 | length 1064.1
  Top Layer w6: v5(2196.64,4654.75) 2203.39,4648 2230.64,4648 2233.64,4645 2319.95,4645 2323.46,4641.49 R6.2@2323.46,4610
  Top Layer w8: R6.2@2335.91,4617.36 2359.05,4617.36 ccw(c2359.05,4625.36) 2364.69,4619.69 2370.77,4625.77 cw(c2376.39,4620.08) 2371.83,4626.65 cw(c2406.42,4576.36) 2411.1,4637.22 ccw(c2411.65,4645.2) 2411.6,4637.2 U13.4@2429,4637.2
  Bottom Layer w6: P13.5@1780,4065 1780,4305 2129.75,4654.75 v5(2196.64,4654.75)
CHRGA: P3.3 P8.3 P13.6 | length 9099.6
  Top Layer w8: P3.3@3358.31,1293.9 3412.75,1293.9 3417.44,1298.58 v4(3417.44,2108.9)
  Bottom Layer w8: P13.6@1777.44,3973.9 1777.44,3898.58 1782.13,3893.9 3592.44,3893.9 3597.44,3888.9 3597.44,2438.9 3417.44,2258.9 v4(3417.44,2108.9) ; P3.3@3358.31,1293.9 ccw(c3589.88,1520.46) 3575.25,1196.82 cw(c3574.85,1188.83) 3580.51,1194.49 3628.76,1146.24 ccw(c3634.42,1151.9) 3634.42,1143.9 4983.98,1143.9 cw(c4983.98,1135.9) 4985.54,1143.74 4985.65,1143.72 cw(c4984.09,1135.88) 4987.04,1143.31 4987.12,1143.28 cw(c4984.1,1135.87) 4987.95,1142.88 4988.08,1142.81 cw(c4984.22,1135.8) 4989.81,1141.52 4989.85,1141.49 5765.1,366.24 ccw(c5770.75,371.9) 5767.97,364.4 5808.38,349.4 ccw(c5816.73,371.9) 5816.73,347.9 6583.63,347.9 ccw(c6583.63,371.9) 6593.8,350.16 6803.2,448.14 cw(c6806.6,440.9) 6806.53,448.9 ccw(c6806.5,456.9) 6812.16,451.24 6957.44,596.53 6957.44,888.9 7015.91,947.37 7050.91,947.37 P8.3@7057.44,953.9
CORAL_3V: P1.1 P3.A11 P16.1 | length 9221.1
  Top Layer w6: P16.1@125,1625 235,1735 235,1825 225,1835 70,1835 -5,1760 -5,1565 375,1185 2547.33,1185 ccw(c2547.33,1191) 2553.33,1190.88 2581.48,2287.59 cw(c2953.26,2278.15) 2606.21,2411.82 cw(c2611.8,2409.63) 2607.28,2413.58 ; 2607.3,2413.6 2761.16,2587.99 cw(c2765.64,2584) 2765.64,2590 2995,2590 3077.51,2590 cw(c3077.51,2584) 3081.76,2588.24 3248.11,2421.89 3291.89,2421.89 3668.31,2045.48 3668.31,1316.69 3791.1,1193.9 P3.A11@3858.31,1193.9
  Top Layer w8: P16.1@125,1625 466.1,1283.9 P1.1@2208.31,1283.9
CORALSD1: P11.1 U1.19 | length 3415.2
  Top Layer w6: v4(2692.44,2273.9) 2692.44,2243.9 2717.72,2218.62 U1.19@2906.46,2218.62
  Bottom Layer w6: P11.1@1282.44,543.9 1392.44,433.9 2337.44,433.9 2672.44,768.9 2672.44,2033.9 2679.34,2040.8 2719.34,2040.8 2752.44,2073.9 2752.44,2213.9 v4(2692.44,2273.9)
CORALSD2: P11.3 U1.20 | length 3301.8
  Top Layer w6: v4(2629.69,2243.9) 2711.84,2205.91 ccw(c2717.72,2218.62) 2717.68,2204.62 2894.5,2204.2 U1.20@2906.46,2202.87
  Bottom Layer w6: P11.3@1382.44,543.9 1382.44,496.38 ccw(c1388.44,496.38) 1384.21,492.13 1415.62,460.72 ccw(c1419.87,464.95) 1419.87,458.95 2309.81,458.95 ccw(c2309.81,464.95) 2314.05,460.71 2652.44,799.1 2652.44,2031.21 cw(c2658.44,2031.21) 2654.2,2035.45 2673.54,2054.8 2710.01,2054.8 2735.44,2080.23 2735.44,2128.41 ; v4(2629.69,2243.9) 2733.82,2132.46 cw(c2729.44,2128.36) 2735.44,2128.46
CORALSD3: P11.5 U1.21 | length 2900.6
  Top Layer w6: v4(2629.69,2187.13) U1.21@2906.46,2187.13
  Bottom Layer w6: P11.5@1482.44,543.9 2322.44,543.9 2570.67,792.13 2570.67,2155.35 2592.69,2177.37 ; 2592.71,2177.4 cw(c2596.9,2173.1) 2595.51,2178.94 v4(2629.69,2187.13)
CORALSD5: P11.6 U1.22 | length 3063
  Top Layer w6: v4(2668.3,2147.96) 2725.61,2153.96 ccw(c2724.98,2159.92) 2729.17,2155.63 ; 2729.2,2155.66 2744.92,2171.38 U1.22@2906.46,2171.38
  Bottom Layer w6: P11.6@1482.44,643.9 1440.94,602.39 ccw(c1445.2,598.17) 1439.2,598.17 1439.2,572.63 cw(c1433.2,572.66) 1438.33,569.56 ccw(c1443.44,566.41) 1437.75,568.31 ccw(c1443.44,566.41) 1437.46,565.97 1438.72,549.02 cw(c1432.74,548.57) 1438.74,548.58 1438.74,525.09 ccw(c1444.74,525.09) 1440.49,520.84 1465.67,495.67 ccw(c1469.93,499.9) 1469.89,493.9 2289.96,493.9 ccw(c2289.96,499.9) 2294.2,495.65 2607.44,808.9 2607.44,2096.41 ; 2607.44,2096.45 cw(c2613.44,2096.38) 2609.69,2101.06 v4(2668.3,2147.96)
CORALSD7: P11.4 U1.23 | length 3090.7
  Top Layer w6: v4(2702.44,2093.9) 2764.17,2155.63 U1.23@2906.46,2155.63
  Bottom Layer w6: P11.4@1382.44,643.9 1410.66,615.68 cw(c1406.42,611.43) 1412.42,611.43 1412.42,606.36 ccw(c1418.42,606.36) 1414.18,602.12 1420.67,595.63 cw(c1416.42,591.39) 1422.42,591.62 1424.15,547.88 cw(c1418.16,547.57) 1424.16,547.57 1424.16,540.6 ccw(c1430.16,540.6) 1424.16,540.36 1424.73,526.06 cw(c1418.74,525.82) 1424.74,525.82 1424.74,525.09 ccw(c1444.74,525.09) 1430.55,510.99 1455.79,485.75 ccw(c1469.93,499.9) 1458.21,483.69 1468.5,476.25 cw(c1464.98,471.38) 1469.21,475.64 ccw(c1473.44,479.9) 1473.44,473.9 2307.44,473.9 2635.44,801.9 2635.44,2088.38 2640.96,2093.9 v4(2702.44,2093.9)
CORALSD8: P11.2 U1.24 | length 3696
  Top Layer w6: v4(2722.44,1993.9) 2811.66,2137.05 cw(c2816.76,2133.88) 2816.76,2139.88 U1.24@2906.46,2139.88
  Bottom Layer w6: 2418.76,707.58 2535.71,824.53 ccw(c2531.44,828.74) 2537.44,828.74 2537.44,2345.41 cw(c2543.44,2345.41) 2543.44,2351.41 2709.93,2351.41 2767.44,2293.9 2767.44,2093.73 cw(c2761.44,2093.79) 2767.02,2091.58 2766.87,2091.2 ccw(c2772.44,2088.98) 2766.44,2089.03 2766.44,2050.89 cw(c2760.44,2050.89) 2764.71,2046.67 2753.63,2035.59 ; v4(2722.44,1993.9) 2733.6,1997.92 ccw(c2731.56,2003.57) 2736.99,2001.02 2752.41,2033.84 cw(c2757.87,2031.35) 2753.62,2035.58
  Bottom Layer w8: P11.2@1282.44,643.9 1292.44,643.9 1292.44,653.9 1345.1,706.55 cw(c1350.75,700.9) 1350.75,708.9 2414.36,708.9 cw(c2414.36,700.9) 2418.76,707.58
CoralSwitch: P3.2 P16.2 | length 6473.1
  Top Layer w8: 55.31,1660.86 ccw(c62.89,1663.43) 57.2,1657.8 65,1650 65,1550 400,1215 2516.69,1215 ccw(c2516.69,1223) 2521.12,1216.34 ccw(c2516.69,1223) 2524.52,1221.37 2536.17,1276.13 ccw(c2500,1283.9) 2536.98,1282.76 ; 55.29,1660.9 cw(c62.89,1663.43) 54.99,1662.15 54.96,1662.29 cw(c62.86,1663.6) 54.86,1663.81 54.86,1663.87 55,1668.05 ccw(c47,1668.31) 55,1668.31 55,1717 cw(c63,1717) 63,1725 P16.2@125,1725 ; 2536.98,1282.79 2566.49,2288.31 cw(c2953.26,2278.15) 2567.98,2313.58 2576.15,2402.42 ccw(c2568.19,2403.15) 2576.17,2402.66 ; 2576.17,2402.69 cw(c2584.16,2402.23) 2578.22,2407.58 2750.03,2598.05 cw(c2765.64,2584) 2765.64,2605 3077.51,2605 cw(c3077.51,2584) 3092.33,2598.88 3126.22,2564.99 3203.32,2487.9 3247.1,2487.9 3705,2030 v2@3705,1393.9
  Bottom Layer w6: P3.2@3358.31,1393.9 v2(3708.9,1393.9)
CS: P3.10 U1.11 | length 1953.4
  Top Layer w6: U1.11@3042.68,2202.87 3107.28,2202.87 3143.31,2238.9 v2(3143.31,2283.9)
  Top Layer w8: v2(3183.31,2098.9) 3166.72,2082.31 3166.72,1950.68 3245.02,1872.39 ; 3247.36,1866.91 3247.36,1429.29 3266.31,1410.34 3266.31,685.9 P3.10@3358.31,593.9 ; 3266.32,979.19 ccw(c3306.31,980.01) 3266.98,972.72
  Bottom Layer w6: v2(3143.31,2283.9) 3183.31,2243.9 v2(3183.31,2098.9)